# EAGLE board MicroMod-LoRa-1W-Function-Board-Panel (EAGLE 9.6.2), part 1 of 2
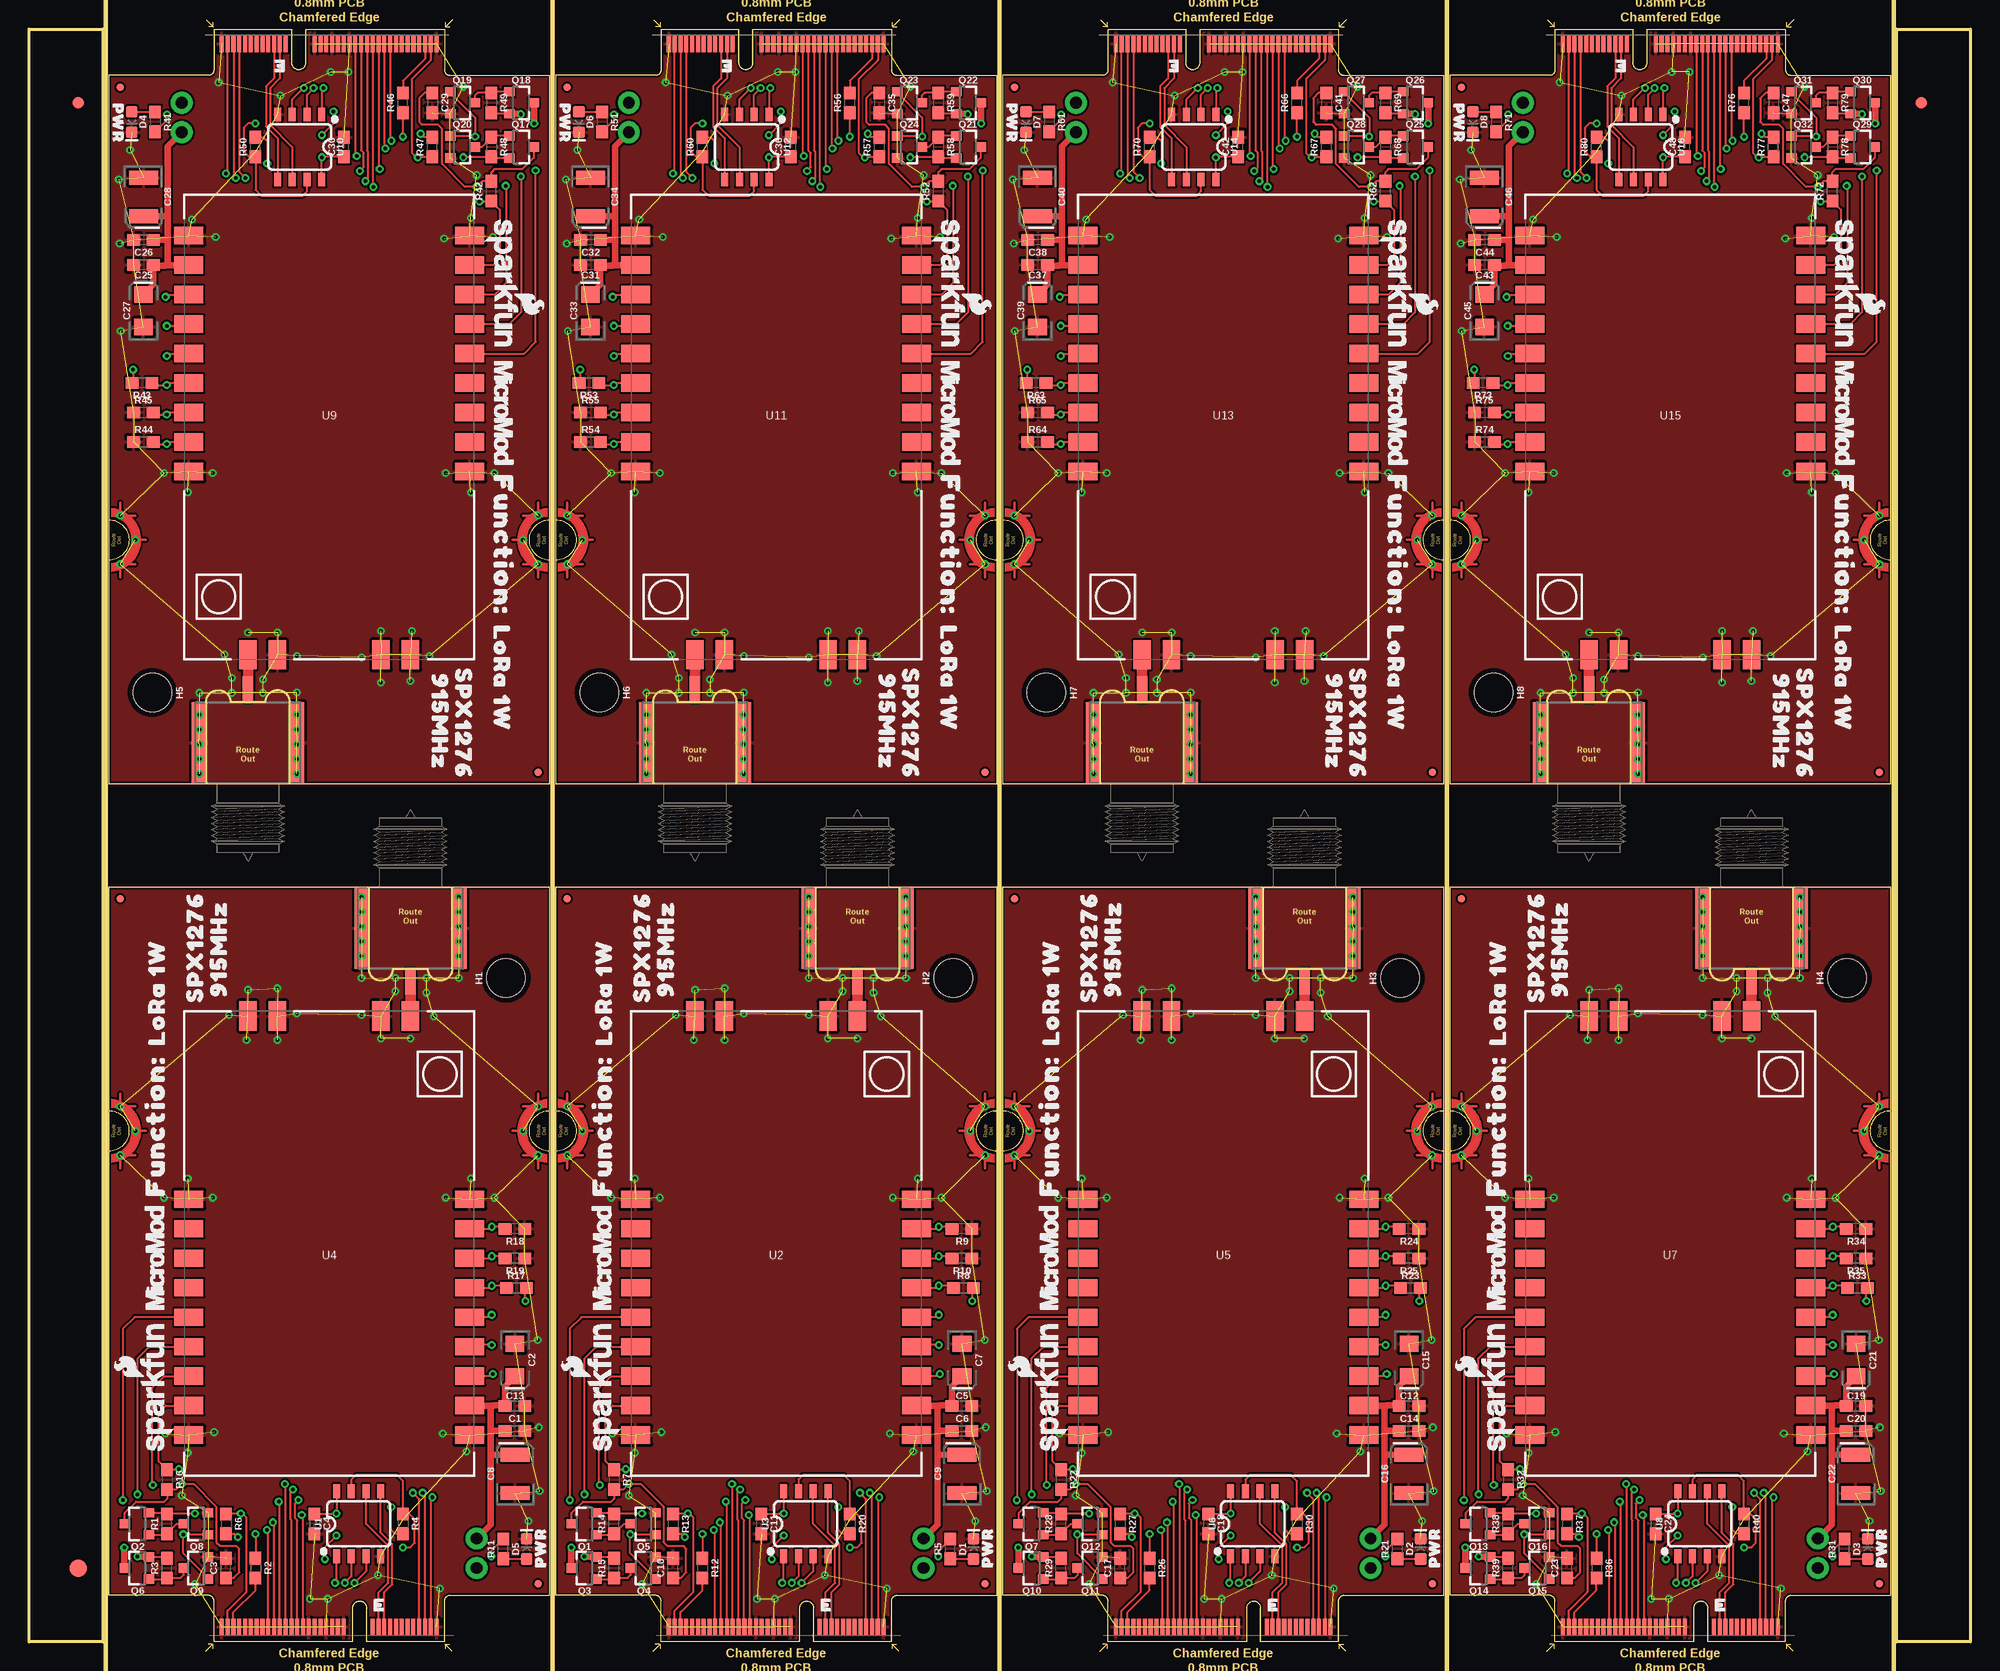
[diagram p0: board, top side]
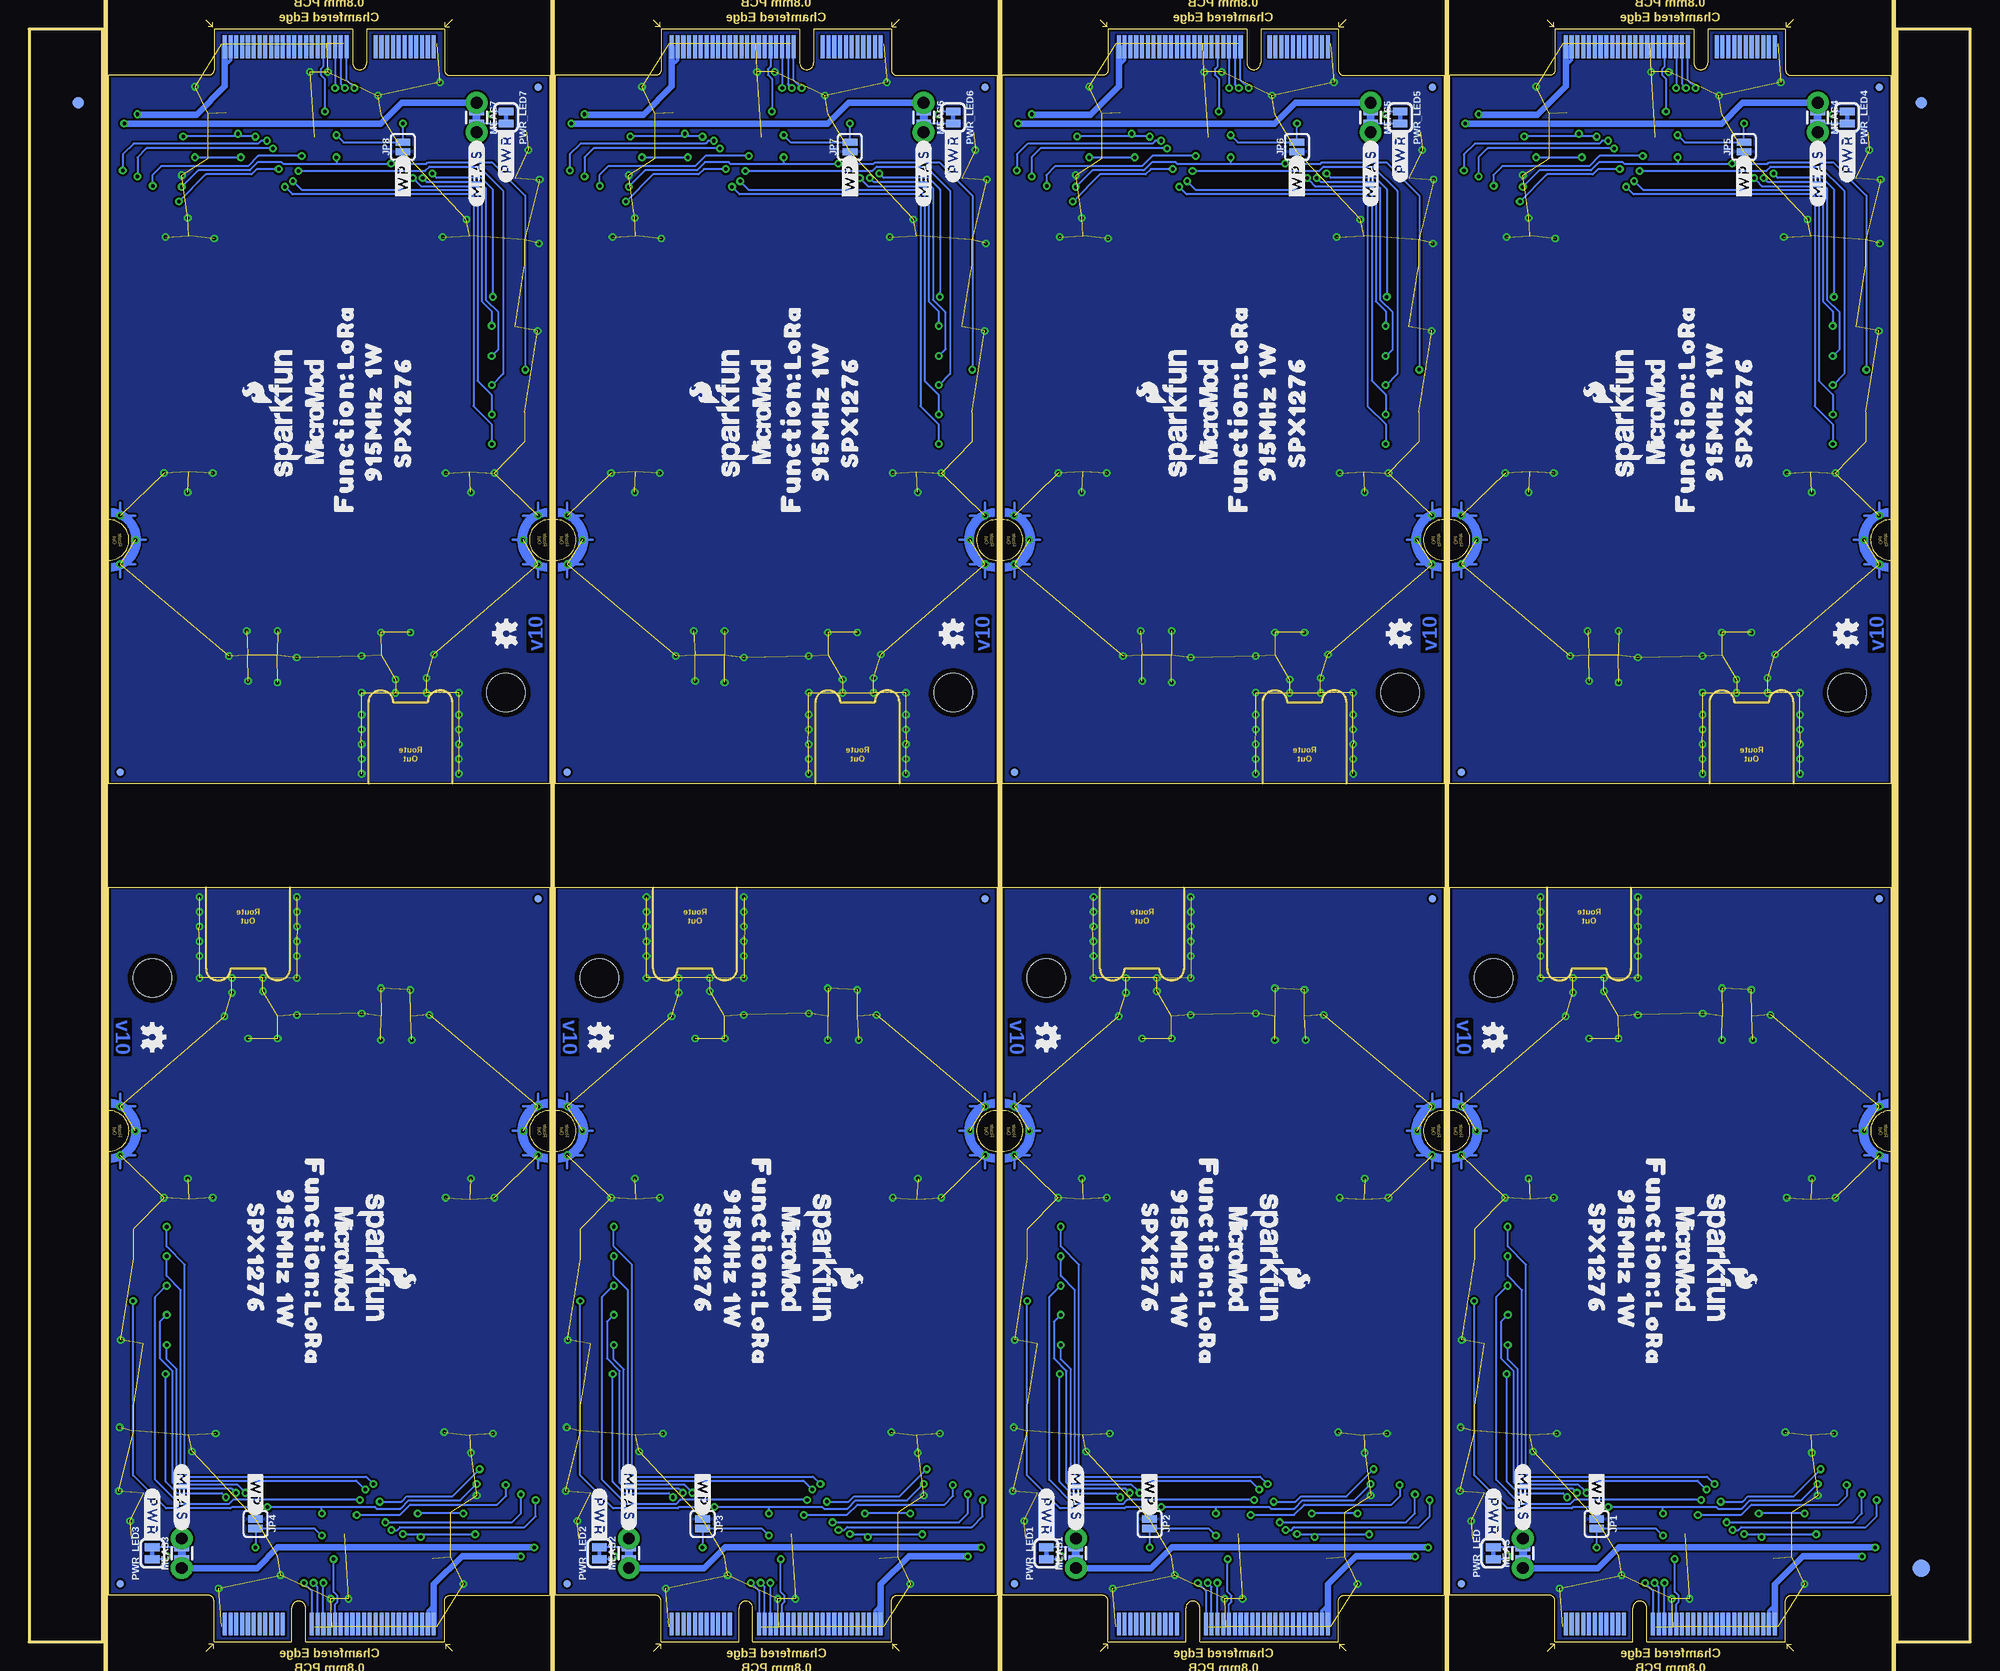
[diagram p1: board, bottom side, seen from below]

Size 167.24 x 138.89 mm. Coordinates in mm from the lower left corner, seen from the top.
Outline: 35.78,0 29.08,0 29.08,2.9 arc180 27.88,2.9 27.88,0 15.93,0 15.93,3.5 arc90 15.46,4 6.86,4 6.86,65 44.86,65 44.86,4 36.26,4 arc90 35.78,3.5 35.78,0
Outline: 74.29,0 67.59,0 67.59,2.9 arc180 66.39,2.9 66.39,0 54.44,0 54.44,3.5 arc90 53.97,4 45.37,4 45.37,65 83.37,65 83.37,4 74.77,4 arc90 74.29,3.5 74.29,0
Outline: 112.8,0 106.1,0 106.1,2.9 arc180 104.9,2.9 104.9,0 92.95,0 92.95,3.5 arc90 92.47,4 83.87,4 83.87,65 121.87,65 121.87,4 113.27,4 arc90 112.8,3.5 112.8,0
Outline: 151.31,0 144.61,0 144.61,2.9 arc180 143.41,2.9 143.41,0 131.46,0 131.46,3.5 arc90 130.98,4 122.38,4 122.38,65 160.38,65 160.38,4 151.78,4 arc90 151.31,3.5 151.31,0
Outline: 15.93,138.89 22.63,138.89 22.63,135.99 arc180 23.84,135.99 23.84,138.89 35.78,138.89 35.78,135.39 arc90 36.26,134.89 44.86,134.89 44.86,73.89 6.86,73.89 6.86,134.89 15.46,134.89 arc90 15.93,135.39 15.93,138.89
Outline: 54.44,138.89 61.14,138.89 61.14,135.99 arc180 62.34,135.99 62.34,138.89 74.29,138.89 74.29,135.39 arc90 74.77,134.89 83.37,134.89 83.37,73.89 45.37,73.89 45.37,134.89 53.97,134.89 arc90 54.44,135.39 54.44,138.89
Outline: 92.95,138.89 99.65,138.89 99.65,135.99 arc180 100.85,135.99 100.85,138.89 112.8,138.89 112.8,135.39 arc90 113.28,134.89 121.88,134.89 121.88,73.89 83.88,73.89 83.88,134.89 92.48,134.89 arc90 92.95,135.39 92.95,138.89
Outline: 131.46,138.89 138.16,138.89 138.16,135.99 arc180 139.36,135.99 139.36,138.89 151.31,138.89 151.31,135.39 arc90 151.78,134.89 160.38,134.89 160.38,73.89 122.38,73.89 122.38,134.89 130.98,134.89 arc90 131.46,135.39 131.46,138.89
Outline: 160.89,138.89 167.24,138.89 167.24,0 160.89,0 160.89,138.89
Outline: 0,138.89 6.35,138.89 6.35,0 0,0 0,138.89
Copper layers (1*16): Top 0.035mm / dielectric 1.5mm / Bottom 0.035mm
Design rules "MicroMod-LoRa-1W-Function-Board": minimum track width 7mil, minimum drill 12mil, track to track 7mil, track to pad 7mil, pad to pad 7mil, via to via 7mil, smd to smd 7mil, copper to edge 7mil, drill to drill 7mil, minimum pad ring 7mil, minimum via ring 7mil, stop-mask expansion 4mil, vias tented up to drill 25mil, thermal gap 10mil
Net classes: 0 default: width 0 mm, drill 0 mm
Milling: 5 lines

## Footprints (pad centres in the part's own frame; a part is rotated, then mirrored left to right if it is on the bottom)
0603 = smd 1.1 x 1: 1 -0.85,0; 2 0.85,0
EIA3216 = smd 1.4 x 1.6: + 1.4,0; - -1.4,0
EIA3528 = smd 1.2 x 2.5: A 1.65,0; C -1.65,0
LED-0603 = smd 1 x 1: A -0.877,0; C 0.877,0
SMA-EDGE-SMD = smd 1.15 x 7: GND@0 -4.25,-3.5; GND@1 4.25,-3.5 | smd 0.9 x 2.2: SIG 0,-8.1
FIDUCIAL-1X2 = smd 1 x 1: 1 0,0
FIDUCIAL-1.5X3 = smd 1.5 x 1.5: 1 0,0
FIDUCIAL-MICRO = smd 0.635 x 0.635: 1 0,0
STAND-OFF = hole 3.302: 0,0
M.2-CARD-E-22_FUNCTION_STANDARD = smd 0.35 x 1.45: 1 9.25,1.275; 3 8.75,1.275; 5 8.25,1.275; 7 7.75,1.275; 9 7.25,1.275; 11 6.75,1.275; 13 6.25,1.275; 15 5.75,1.275; 17 5.25,1.275; 19 4.75,1.275; 21 4.25,1.275; 23 3.75,1.275; 33 1.25,1.275; 35 0.75,1.275; 37 0.25,1.275; 39 -0.25,1.275; 41 -0.75,1.275; 43 -1.25,1.275; 45 -1.75,1.275; 47 -2.25,1.275; 49 -2.75,1.275; 51 -3.25,1.275; 53 -3.75,1.275; 55 -4.25,1.275; 57 -4.75,1.275; 59 -5.25,1.275; 61 -5.75,1.275; 63 -6.25,1.275; 65 -6.75,1.275; 67 -7.25,1.275; 69 -7.75,1.275; 71 -8.25,1.275; 73 -8.75,1.275; 75 -9.25,1.275 | smd 0.35 x 1.95 bottom: 2 9,1.525; 4 8.5,1.525; 6 8,1.525; 8 7.5,1.525; 10 7,1.525; 12 6.5,1.525; 14 6,1.525; 16 5.5,1.525; 18 5,1.525; 20 4.5,1.525; 22 4,1.525; 32 1.5,1.525; 34 1,1.525; 36 0.5,1.525; 38 0,1.525; 40 -0.5,1.525; 42 -1,1.525; 44 -1.5,1.525; 46 -2,1.525; 48 -2.5,1.525; 50 -3,1.525; 52 -3.5,1.525; 54 -4,1.525; 56 -4.5,1.525; 58 -5,1.525; 60 -5.5,1.525; 62 -6,1.525; 64 -6.5,1.525; 66 -7,1.525; 68 -7.5,1.525; 70 -8,1.525; 72 -8.5,1.525; 74 -9,1.525 | drill 0.305 pad 0.61: GND1 -18,41.9; GND2 -16.7,44; GND3 -18,46.1; GND4 18,41.9; GND5 16.7,44; GND6 18,46.1
SMT-JUMPER_2_NO_SILK = smd 0.635 x 1.27: 1 -0.406,0; 2 0.406,0
COMBO-JUMPER_2_NC_TRACE = smd 0.635 x 1.27: 1 -0.508,0; 2 0.508,0 | drill 1.016 pad 1.88: 3 -1.27,0; 4 1.27,0
SMT-JUMPER_2_NC_TRACE_SILK = smd 0.66 x 1.27: 1 -0.521,0; 2 0.521,0
SOT23-3 = smd 0.8 x 0.9: 1 -0.95,-1; 2 0.95,-1; 3 0,1.1
SO08 = smd 0.6 x 1.2: 1 -1.905,-2.8; 2 -0.635,-2.8; 3 0.635,-2.8; 4 1.905,-2.8; 5 1.905,2.8; 6 0.635,2.8; 7 -0.635,2.8; 8 -1.905,2.8
E19-915MS1W = smd 2.5 x 1.5: 1 12.1,-3.82; 2 12.1,-1.28; 3 12.1,1.26; 4 12.1,3.8; 5 12.1,6.34; 6 12.1,8.88; 7 12.1,11.42; 8 12.1,13.96; 9 12.1,16.5; 10 -12.1,16.5; 11 -12.1,13.96; 12 -12.1,11.42; 13 -12.1,8.88; 14 -12.1,6.34; 15 -12.1,3.8; 16 -12.1,1.26; 17 -12.1,-1.28; 18 -12.1,-3.82 | smd 1.5 x 2.5: 19 -7,-19.6; 20 -4.46,-19.6; 21 4.46,-19.6; 22 7,-19.6

## Placement (x,y rotation side)
C1  0.1uF  [0603]  41.86,18.16 0 top
C2  10uF  [EIA3216]  41.86,24.26 270 top
C3  0.1uF  [0603]  16.97,6.35 90 top
C4  0.1uF  [0603]  24.59,10.16 270 top
C5  0.22uF  [0603]  80.37,20.32 0 top
C6  0.1uF  [0603]  80.37,18.16 0 top
C7  10uF  [EIA3216]  80.37,24.26 270 top
C8  47uF  [EIA3528]  41.86,14.46 90 top
C9  47uF  [EIA3528]  80.37,14.46 90 top
C10  0.1uF  [0603]  55.48,6.35 90 top
C11  0.1uF  [0603]  63.1,10.16 270 top
C12  0.22uF  [0603]  118.87,20.32 0 top
C13  0.22uF  [0603]  41.86,20.32 0 top
C14  0.1uF  [0603]  118.87,18.16 0 top
C15  10uF  [EIA3216]  118.87,24.26 270 top
C16  47uF  [EIA3528]  118.87,14.46 90 top
C17  0.1uF  [0603]  93.98,6.35 90 top
C18  0.1uF  [0603]  101.6,10.16 270 top
C19  0.22uF  [0603]  157.38,20.32 0 top
C20  0.1uF  [0603]  157.38,18.16 0 top
C21  10uF  [EIA3216]  157.38,24.26 270 top
C22  47uF  [EIA3528]  157.38,14.46 90 top
C23  0.1uF  [0603]  132.49,6.35 90 top
C24  0.1uF  [0603]  140.11,10.16 270 top
C25  0.22uF  [0603]  9.86,118.57 180 top
C26  0.1uF  [0603]  9.86,120.73 180 top
C27  10uF  [EIA3216]  9.86,114.63 90 top
C28  47uF  [EIA3528]  9.86,124.43 270 top
C29  0.1uF  [0603]  34.75,132.54 270 top
C30  0.1uF  [0603]  27.13,128.73 90 top
C31  0.22uF  [0603]  48.36,118.57 180 top
C32  0.1uF  [0603]  48.36,120.73 180 top
C33  10uF  [EIA3216]  48.36,114.63 90 top
C34  47uF  [EIA3528]  48.37,124.43 270 top
C35  0.1uF  [0603]  73.26,132.54 270 top
C36  0.1uF  [0603]  65.64,128.73 90 top
C37  0.22uF  [0603]  86.87,118.57 180 top
C38  0.1uF  [0603]  86.87,120.73 180 top
C39  10uF  [EIA3216]  86.87,114.63 90 top
C40  47uF  [EIA3528]  86.88,124.43 270 top
C41  0.1uF  [0603]  111.77,132.54 270 top
C42  0.1uF  [0603]  104.15,128.73 90 top
C43  0.22uF  [0603]  125.38,118.57 180 top
C44  0.1uF  [0603]  125.38,120.73 180 top
C45  10uF  [EIA3216]  125.38,114.63 90 top
C46  47uF  [EIA3528]  125.38,124.43 270 top
C47  0.1uF  [0603]  150.27,132.54 270 top
C48  0.1uF  [0603]  142.65,128.73 90 top
D1  RED  [LED-0603]  81.37,8 90 top
D2  RED  [LED-0603]  119.87,8 90 top
D3  RED  [LED-0603]  158.38,8 90 top
D4  RED  [LED-0603]  8.86,130.89 270 top
D5  RED  [LED-0603]  42.86,8 90 top
D6  RED  [LED-0603]  47.37,130.89 270 top
D7  RED  [LED-0603]  85.88,130.89 270 top
D8  RED  [LED-0603]  124.38,130.89 270 top
E1  RP-SMA  [SMA-EDGE-SMD]  32.86,64.96 0 top
E2  RP-SMA  [SMA-EDGE-SMD]  71.37,64.96 0 top
E3  RP-SMA  [SMA-EDGE-SMD]  109.87,64.96 0 top
E4  RP-SMA  [SMA-EDGE-SMD]  148.38,64.96 0 top
E5  RP-SMA  [SMA-EDGE-SMD]  18.86,73.93 180 top
E6  RP-SMA  [SMA-EDGE-SMD]  57.37,73.93 180 top
E7  RP-SMA  [SMA-EDGE-SMD]  95.88,73.93 180 top
E8  RP-SMA  [SMA-EDGE-SMD]  134.38,73.93 180 top
E$1  [FIDUCIAL-1X2]  4.23,132.54 0 top
E$2  [FIDUCIAL-1X2]  4.23,132.54 0 bottom
E$3  [FIDUCIAL-1X2]  163.01,132.54 0 top
E$4  [FIDUCIAL-1X2]  163.01,132.54 0 bottom
E$5  [FIDUCIAL-1.5X3]  4.23,6.35 0 top
E$6  [FIDUCIAL-1.5X3]  4.23,6.35 0 bottom
FD1  FIDUCIALUFIDUCIAL  [FIDUCIAL-MICRO]  43.86,5 90 top
FD2  FIDUCIALUFIDUCIAL  [FIDUCIAL-MICRO]  7.86,64 90 top
FD3  FIDUCIALUFIDUCIAL  [FIDUCIAL-MICRO]  43.86,5 270 bottom
FD4  FIDUCIALUFIDUCIAL  [FIDUCIAL-MICRO]  7.86,64 270 bottom
FD5  FIDUCIALUFIDUCIAL  [FIDUCIAL-MICRO]  82.37,5 90 top
FD6  FIDUCIALUFIDUCIAL  [FIDUCIAL-MICRO]  46.37,64 90 top
FD7  FIDUCIALUFIDUCIAL  [FIDUCIAL-MICRO]  82.37,5 270 bottom
FD8  FIDUCIALUFIDUCIAL  [FIDUCIAL-MICRO]  46.37,64 270 bottom
FD9  FIDUCIALUFIDUCIAL  [FIDUCIAL-MICRO]  120.87,5 90 top
FD10  FIDUCIALUFIDUCIAL  [FIDUCIAL-MICRO]  84.87,64 90 top
FD11  FIDUCIALUFIDUCIAL  [FIDUCIAL-MICRO]  120.87,5 270 bottom
FD12  FIDUCIALUFIDUCIAL  [FIDUCIAL-MICRO]  84.87,64 270 bottom
FD13  FIDUCIALUFIDUCIAL  [FIDUCIAL-MICRO]  159.38,5 90 top
FD14  FIDUCIALUFIDUCIAL  [FIDUCIAL-MICRO]  123.38,64 90 top
FD15  FIDUCIALUFIDUCIAL  [FIDUCIAL-MICRO]  159.38,5 270 bottom
FD16  FIDUCIALUFIDUCIAL  [FIDUCIAL-MICRO]  123.38,64 270 bottom
FD17  FIDUCIALUFIDUCIAL  [FIDUCIAL-MICRO]  7.86,133.89 270 top
FD18  FIDUCIALUFIDUCIAL  [FIDUCIAL-MICRO]  43.86,74.89 270 top
FD19  FIDUCIALUFIDUCIAL  [FIDUCIAL-MICRO]  7.86,133.89 90 bottom
FD20  FIDUCIALUFIDUCIAL  [FIDUCIAL-MICRO]  43.86,74.89 90 bottom
FD21  FIDUCIALUFIDUCIAL  [FIDUCIAL-MICRO]  46.37,133.89 270 top
FD22  FIDUCIALUFIDUCIAL  [FIDUCIAL-MICRO]  82.37,74.89 270 top
FD23  FIDUCIALUFIDUCIAL  [FIDUCIAL-MICRO]  46.37,133.89 90 bottom
FD24  FIDUCIALUFIDUCIAL  [FIDUCIAL-MICRO]  82.37,74.89 90 bottom
FD25  FIDUCIALUFIDUCIAL  [FIDUCIAL-MICRO]  84.88,133.89 270 top
FD26  FIDUCIALUFIDUCIAL  [FIDUCIAL-MICRO]  120.88,74.89 270 top
FD27  FIDUCIALUFIDUCIAL  [FIDUCIAL-MICRO]  84.88,133.89 90 bottom
FD28  FIDUCIALUFIDUCIAL  [FIDUCIAL-MICRO]  120.88,74.89 90 bottom
FD29  FIDUCIALUFIDUCIAL  [FIDUCIAL-MICRO]  123.38,133.89 270 top
FD30  FIDUCIALUFIDUCIAL  [FIDUCIAL-MICRO]  159.38,74.89 270 top
FD31  FIDUCIALUFIDUCIAL  [FIDUCIAL-MICRO]  123.38,133.89 90 bottom
FD32  FIDUCIALUFIDUCIAL  [FIDUCIAL-MICRO]  159.38,74.89 90 bottom
H1  STAND-OFF  [STAND-OFF]  41.1,57.15 90 top
H2  STAND-OFF  [STAND-OFF]  79.61,57.15 90 top
H3  STAND-OFF  [STAND-OFF]  118.11,57.15 90 top
H4  STAND-OFF  [STAND-OFF]  156.62,57.15 90 top
H5  STAND-OFF  [STAND-OFF]  10.62,81.74 270 top
H6  STAND-OFF  [STAND-OFF]  49.13,81.74 270 top
H7  STAND-OFF  [STAND-OFF]  87.64,81.74 270 top
H8  STAND-OFF  [STAND-OFF]  126.14,81.74 270 top
J1  MICROMOD_STANDARD  [M.2-CARD-E-22_FUNCTION_STANDARD]  64.37,0 0 top
J2  MICROMOD_STANDARD  [M.2-CARD-E-22_FUNCTION_STANDARD]  102.87,0 0 top
J3  MICROMOD_STANDARD  [M.2-CARD-E-22_FUNCTION_STANDARD]  141.38,0 0 top
J4  MICROMOD_STANDARD  [M.2-CARD-E-22_FUNCTION_STANDARD]  25.86,138.89 180 top
J5  MICROMOD_STANDARD  [M.2-CARD-E-22_FUNCTION_STANDARD]  64.37,138.89 180 top
J6  MICROMOD_STANDARD  [M.2-CARD-E-22_FUNCTION_STANDARD]  102.88,138.89 180 top
J7  MICROMOD_STANDARD  [M.2-CARD-E-22_FUNCTION_STANDARD]  141.38,138.89 180 top
J11  MICROMOD_STANDARD  [M.2-CARD-E-22_FUNCTION_STANDARD]  25.86,0 0 top
JP1  JUMPER-SMT_2_NO_SILK  [SMT-JUMPER_2_NO_SILK]  32.21,10.16 270 bottom
JP2  JUMPER-SMT_2_NO_SILK  [SMT-JUMPER_2_NO_SILK]  70.72,10.16 270 bottom
JP3  JUMPER-SMT_2_NO_SILK  [SMT-JUMPER_2_NO_SILK]  109.22,10.16 270 bottom
JP4  JUMPER-SMT_2_NO_SILK  [SMT-JUMPER_2_NO_SILK]  147.73,10.16 270 bottom
JP5  JUMPER-SMT_2_NO_SILK  [SMT-JUMPER_2_NO_SILK]  19.51,128.73 90 bottom
JP6  JUMPER-SMT_2_NO_SILK  [SMT-JUMPER_2_NO_SILK]  58.02,128.73 90 bottom
JP7  JUMPER-SMT_2_NO_SILK  [SMT-JUMPER_2_NO_SILK]  96.53,128.73 90 bottom
JP8  JUMPER-SMT_2_NO_SILK  [SMT-JUMPER_2_NO_SILK]  135.03,128.73 90 bottom
LOGO1  SFE_LOGO_NAME_FLAME.1_INCH  [SFE_LOGO_NAME_FLAME_.1]  11,21.97 90 top
LOGO2  SFE_LOGO_NAME_FLAME.1_INCH  [SFE_LOGO_NAME_FLAME_.1]  49.51,21.97 90 top
LOGO3  OSHW-LOGOMINI  [OSHW-LOGO-MINI]  41.1,52.07 270 bottom
LOGO4  SFE_LOGO_NAME_FLAME.1_INCH  [SFE_LOGO_NAME_FLAME_.1]  22.05,33.02 270 bottom
LOGO5  OSHW-LOGOMINI  [OSHW-LOGO-MINI]  79.61,52.07 270 bottom
LOGO6  SFE_LOGO_NAME_FLAME.1_INCH  [SFE_LOGO_NAME_FLAME_.1]  60.56,33.02 270 bottom
LOGO7  SFE_LOGO_NAME_FLAME.1_INCH  [SFE_LOGO_NAME_FLAME_.1]  88.01,21.97 90 top
LOGO8  OSHW-LOGOMINI  [OSHW-LOGO-MINI]  118.11,52.07 270 bottom
LOGO9  SFE_LOGO_NAME_FLAME.1_INCH  [SFE_LOGO_NAME_FLAME_.1]  99.06,33.02 270 bottom
LOGO10  SFE_LOGO_NAME_FLAME.1_INCH  [SFE_LOGO_NAME_FLAME_.1]  126.52,21.97 90 top
LOGO11  OSHW-LOGOMINI  [OSHW-LOGO-MINI]  156.62,52.07 270 bottom
LOGO12  SFE_LOGO_NAME_FLAME.1_INCH  [SFE_LOGO_NAME_FLAME_.1]  137.57,33.02 270 bottom
LOGO13  SFE_LOGO_NAME_FLAME.1_INCH  [SFE_LOGO_NAME_FLAME_.1]  40.72,116.92 270 top
LOGO14  OSHW-LOGOMINI  [OSHW-LOGO-MINI]  10.62,86.82 90 bottom
LOGO15  SFE_LOGO_NAME_FLAME.1_INCH  [SFE_LOGO_NAME_FLAME_.1]  29.67,105.87 90 bottom
LOGO16  SFE_LOGO_NAME_FLAME.1_INCH  [SFE_LOGO_NAME_FLAME_.1]  79.23,116.92 270 top
LOGO17  OSHW-LOGOMINI  [OSHW-LOGO-MINI]  49.13,86.82 90 bottom
LOGO18  SFE_LOGO_NAME_FLAME.1_INCH  [SFE_LOGO_NAME_FLAME_.1]  68.18,105.87 90 bottom
LOGO19  SFE_LOGO_NAME_FLAME.1_INCH  [SFE_LOGO_NAME_FLAME_.1]  117.73,116.92 270 top
LOGO20  OSHW-LOGOMINI  [OSHW-LOGO-MINI]  87.64,86.82 90 bottom
LOGO21  SFE_LOGO_NAME_FLAME.1_INCH  [SFE_LOGO_NAME_FLAME_.1]  106.69,105.87 90 bottom
LOGO22  SFE_LOGO_NAME_FLAME.1_INCH  [SFE_LOGO_NAME_FLAME_.1]  156.24,116.92 270 top
LOGO23  OSHW-LOGOMINI  [OSHW-LOGO-MINI]  126.14,86.82 90 bottom
LOGO24  SFE_LOGO_NAME_FLAME.1_INCH  [SFE_LOGO_NAME_FLAME_.1]  145.19,105.87 90 bottom
MEAS  JUMPER-COMBO_2_NC_TRACE  [COMBO-JUMPER_2_NC_TRACE]  38.56,7.62 90 bottom
MEAS1  JUMPER-COMBO_2_NC_TRACE  [COMBO-JUMPER_2_NC_TRACE]  77.07,7.62 90 bottom
MEAS2  JUMPER-COMBO_2_NC_TRACE  [COMBO-JUMPER_2_NC_TRACE]  115.57,7.62 90 bottom
MEAS3  JUMPER-COMBO_2_NC_TRACE  [COMBO-JUMPER_2_NC_TRACE]  154.08,7.62 90 bottom
MEAS4  JUMPER-COMBO_2_NC_TRACE  [COMBO-JUMPER_2_NC_TRACE]  13.16,131.27 270 bottom
MEAS5  JUMPER-COMBO_2_NC_TRACE  [COMBO-JUMPER_2_NC_TRACE]  51.67,131.27 270 bottom
MEAS6  JUMPER-COMBO_2_NC_TRACE  [COMBO-JUMPER_2_NC_TRACE]  90.18,131.27 270 bottom
MEAS7  JUMPER-COMBO_2_NC_TRACE  [COMBO-JUMPER_2_NC_TRACE]  128.68,131.27 270 bottom
PWR_LED  JUMPER-SMT_2_NC_TRACE_SILK  [SMT-JUMPER_2_NC_TRACE_SILK]  41.1,7.62 90 bottom
PWR_LED1  JUMPER-SMT_2_NC_TRACE_SILK  [SMT-JUMPER_2_NC_TRACE_SILK]  79.61,7.62 90 bottom
PWR_LED2  JUMPER-SMT_2_NC_TRACE_SILK  [SMT-JUMPER_2_NC_TRACE_SILK]  118.11,7.62 90 bottom
PWR_LED3  JUMPER-SMT_2_NC_TRACE_SILK  [SMT-JUMPER_2_NC_TRACE_SILK]  156.62,7.62 90 bottom
PWR_LED4  JUMPER-SMT_2_NC_TRACE_SILK  [SMT-JUMPER_2_NC_TRACE_SILK]  10.62,131.27 270 bottom
PWR_LED5  JUMPER-SMT_2_NC_TRACE_SILK  [SMT-JUMPER_2_NC_TRACE_SILK]  49.13,131.27 270 bottom
PWR_LED6  JUMPER-SMT_2_NC_TRACE_SILK  [SMT-JUMPER_2_NC_TRACE_SILK]  87.64,131.27 270 bottom
PWR_LED7  JUMPER-SMT_2_NC_TRACE_SILK  [SMT-JUMPER_2_NC_TRACE_SILK]  126.14,131.27 270 bottom
Q1  20V/4.2A/52mΩ/1.4W  [SOT23-3]  47.86,10.16 90 top
Q2  20V/4.2A/52mΩ/1.4W  [SOT23-3]  9.35,10.16 90 top
Q3  20V/4.2A/52mΩ/1.4W  [SOT23-3]  47.86,6.35 90 top
Q4  5.8A/30V/35mΩ  [SOT23-3]  52.94,6.35 90 top
Q5  5.8A/30V/35mΩ  [SOT23-3]  52.94,10.16 90 top
Q6  20V/4.2A/52mΩ/1.4W  [SOT23-3]  9.35,6.35 90 top
Q7  20V/4.2A/52mΩ/1.4W  [SOT23-3]  86.36,10.16 90 top
Q8  5.8A/30V/35mΩ  [SOT23-3]  14.43,10.16 90 top
Q9  5.8A/30V/35mΩ  [SOT23-3]  14.43,6.35 90 top
Q10  20V/4.2A/52mΩ/1.4W  [SOT23-3]  86.36,6.35 90 top
Q11  5.8A/30V/35mΩ  [SOT23-3]  91.44,6.35 90 top
Q12  5.8A/30V/35mΩ  [SOT23-3]  91.44,10.16 90 top
Q13  20V/4.2A/52mΩ/1.4W  [SOT23-3]  124.87,10.16 90 top
Q14  20V/4.2A/52mΩ/1.4W  [SOT23-3]  124.87,6.35 90 top
Q15  5.8A/30V/35mΩ  [SOT23-3]  129.95,6.35 90 top
Q16  5.8A/30V/35mΩ  [SOT23-3]  129.95,10.16 90 top
Q17  20V/4.2A/52mΩ/1.4W  [SOT23-3]  42.37,128.73 270 top
Q18  20V/4.2A/52mΩ/1.4W  [SOT23-3]  42.37,132.54 270 top
Q19  5.8A/30V/35mΩ  [SOT23-3]  37.29,132.54 270 top
Q20  5.8A/30V/35mΩ  [SOT23-3]  37.29,128.73 270 top
Q21  20V/4.2A/52mΩ/1.4W  [SOT23-3]  80.88,128.73 270 top
Q22  20V/4.2A/52mΩ/1.4W  [SOT23-3]  80.88,132.54 270 top
Q23  5.8A/30V/35mΩ  [SOT23-3]  75.8,132.54 270 top
Q24  5.8A/30V/35mΩ  [SOT23-3]  75.8,128.73 270 top
Q25  20V/4.2A/52mΩ/1.4W  [SOT23-3]  119.39,128.73 270 top
Q26  20V/4.2A/52mΩ/1.4W  [SOT23-3]  119.39,132.54 270 top
Q27  5.8A/30V/35mΩ  [SOT23-3]  114.31,132.54 270 top
Q28  5.8A/30V/35mΩ  [SOT23-3]  114.31,128.73 270 top
Q29  20V/4.2A/52mΩ/1.4W  [SOT23-3]  157.89,128.73 270 top
Q30  20V/4.2A/52mΩ/1.4W  [SOT23-3]  157.89,132.54 270 top
Q31  5.8A/30V/35mΩ  [SOT23-3]  152.81,132.54 270 top
Q32  5.8A/30V/35mΩ  [SOT23-3]  152.81,128.73 270 top
R1  10k  [0603]  11.89,10.16 90 top
R2  470  [0603]  19.51,6.35 270 top
R3  10k  [0603]  11.89,6.35 90 top
R4  10k  [0603]  32.21,10.16 270 top
R5  1k  [0603]  79.37,8 90 top
R6  100k  [0603]  16.97,10.16 270 top
R7  100k  [0603]  50.4,13.97 270 top
R8  100k  [0603]  80.5,30.48 0 top
R9  100k  [0603]  80.37,35.56 180 top
R10  100k  [0603]  80.37,33.02 180 top
R11  1k  [0603]  40.86,8 90 top
R12  470  [0603]  58.02,6.35 270 top
R13  100k  [0603]  55.48,10.16 270 top
R14  10k  [0603]  50.4,10.16 90 top
R15  10k  [0603]  50.4,6.35 90 top
R16  100k  [0603]  11.89,13.97 270 top
R17  100k  [0603]  41.99,30.48 0 top
R18  100k  [0603]  41.86,35.56 180 top
R19  100k  [0603]  41.86,33.02 180 top
R20  10k  [0603]  70.72,10.16 270 top
R21  1k  [0603]  117.87,8 90 top
R22  100k  [0603]  88.9,13.97 270 top
R23  100k  [0603]  119,30.48 0 top
R24  100k  [0603]  118.87,35.56 180 top
R25  100k  [0603]  118.87,33.02 180 top
R26  470  [0603]  96.52,6.35 270 top
R27  100k  [0603]  93.98,10.16 270 top
R28  10k  [0603]  88.9,10.16 90 top
R29  10k  [0603]  88.9,6.35 90 top
R30  10k  [0603]  109.22,10.16 270 top
R31  1k  [0603]  156.38,8 90 top
R32  100k  [0603]  127.41,13.97 270 top
R33  100k  [0603]  157.51,30.48 0 top
R34  100k  [0603]  157.38,35.56 180 top
R35  100k  [0603]  157.38,33.02 180 top
R36  470  [0603]  135.03,6.35 270 top
R37  100k  [0603]  132.49,10.16 270 top
R38  10k  [0603]  127.41,10.16 90 top
R39  10k  [0603]  127.41,6.35 90 top
R40  10k  [0603]  147.73,10.16 270 top
R41  1k  [0603]  10.86,130.89 270 top
R42  100k  [0603]  39.83,124.92 90 top
R43  100k  [0603]  9.73,108.41 180 top
R44  100k  [0603]  9.86,103.33 0 top
R45  100k  [0603]  9.86,105.87 0 top
R46  470  [0603]  32.21,132.54 90 top
R47  100k  [0603]  34.75,128.73 90 top
R48  10k  [0603]  39.83,128.73 270 top
R49  10k  [0603]  39.83,132.54 270 top
R50  10k  [0603]  19.51,128.73 90 top
R51  1k  [0603]  49.37,130.89 270 top
R52  100k  [0603]  78.34,124.92 90 top
R53  100k  [0603]  48.24,108.41 180 top
R54  100k  [0603]  48.36,103.33 0 top
R55  100k  [0603]  48.36,105.87 0 top
R56  470  [0603]  70.72,132.54 90 top
R57  100k  [0603]  73.26,128.73 90 top
R58  10k  [0603]  78.34,128.73 270 top
R59  10k  [0603]  78.34,132.54 270 top
R60  10k  [0603]  58.02,128.73 90 top
R61  1k  [0603]  87.88,130.89 270 top
R62  100k  [0603]  116.85,124.92 90 top
R63  100k  [0603]  86.75,108.41 180 top
R64  100k  [0603]  86.87,103.33 0 top
R65  100k  [0603]  86.87,105.87 0 top
R66  470  [0603]  109.23,132.54 90 top
R67  100k  [0603]  111.77,128.73 90 top
R68  10k  [0603]  116.85,128.73 270 top
R69  10k  [0603]  116.85,132.54 270 top
R70  10k  [0603]  96.53,128.73 90 top
R71  1k  [0603]  126.38,130.89 270 top
R72  100k  [0603]  155.35,124.92 90 top
R73  100k  [0603]  125.26,108.41 180 top
R74  100k  [0603]  125.38,103.33 0 top
R75  100k  [0603]  125.38,105.87 0 top
R76  470  [0603]  147.73,132.54 90 top
R77  100k  [0603]  150.27,128.73 90 top
R78  10k  [0603]  155.35,128.73 270 top
R79  10k  [0603]  155.35,132.54 270 top
R80  10k  [0603]  135.03,128.73 90 top
U1  EEPROM  [SO08]  28.4,10.16 0 top
U2  E19-915M30S  [E19-915MS1W]  64.37,34.29 180 top
U3  EEPROM  [SO08]  66.91,10.16 0 top
U4  E19-915M30S  [E19-915MS1W]  25.86,34.29 180 top
U5  E19-915M30S  [E19-915MS1W]  102.87,34.29 180 top
U6  EEPROM  [SO08]  105.41,10.16 0 top
U7  E19-915M30S  [E19-915MS1W]  141.38,34.29 180 top
U8  EEPROM  [SO08]  143.92,10.16 0 top
U9  E19-915M30S  [E19-915MS1W]  25.86,104.6 0 top
U10  EEPROM  [SO08]  23.32,128.73 180 top
U11  E19-915M30S  [E19-915MS1W]  64.37,104.6 0 top
U12  EEPROM  [SO08]  61.83,128.73 180 top
U13  E19-915M30S  [E19-915MS1W]  102.88,104.6 0 top
U14  EEPROM  [SO08]  100.34,128.73 180 top
U15  E19-915M30S  [E19-915MS1W]  141.38,104.6 0 top
U16  EEPROM  [SO08]  138.84,128.73 180 top
U$1  [LORA0]  27.25,26.54 270 bottom
U$2  [1W1]  11,58.93 90 top
U$3  [915MHZ2]  16.33,59.69 90 top
U$4  [FUNCTION#0]  27.13,35.56 270 bottom
U$5  [LORA0]  11,54.1 90 top
U$6  [SPX12763]  14.3,59.82 90 top
U$7  [PWR0]  44.06,8.1 90 top
U$8  [FUNCTION#0]  10.87,44.45 90 top
U$9  [#PWR#0]  41.1,10.79 270 bottom
U$10  [#WP#0]  32.21,12.83 270 bottom
U$11  [MICROMOD_LOGO_.35]  49.37,33 90 top
U$12  [MICROMOD_LOGO_.35]  63.1,33.02 270 bottom
U$13  [#MEAS#3]  77.07,15.24 270 bottom
U$14  [1W1]  49.51,58.93 90 top
U$15  [915MHZ2]  54.84,59.69 90 top
U$16  [LORA0]  49.51,54.1 90 top
U$17  [SPX12763]  52.81,59.82 90 top
U$18  [PWR0]  82.57,8.1 90 top
U$19  [LORA0]  65.76,26.54 270 bottom
U$20  [SPX12763]  70.72,33.02 270 bottom
U$21  [915MHZ2]  68.18,34.8 270 bottom
U$22  [1W1]  68.18,28.45 270 bottom
U$23  [FUNCTION#0]  49.38,44.45 90 top
U$24  [#PWR#0]  79.61,10.79 270 bottom
U$25  [FUNCTION#0]  65.64,35.56 270 bottom
U$26  [#WP#0]  70.72,12.83 270 bottom
U$27  [SPX12763]  32.21,33.02 270 bottom
U$28  [#MEAS#3]  38.56,15.24 270 bottom
U$29  [915MHZ2]  29.67,34.8 270 bottom
U$30  [1W1]  29.67,28.45 270 bottom
U$31  [MICROMOD_LOGO_.35]  87.87,33 90 top
U$32  [MICROMOD_LOGO_.35]  101.6,33.02 270 bottom
U$33  [#MEAS#3]  115.57,15.24 270 bottom
U$34  [1W1]  88.01,58.93 90 top
U$35  [915MHZ2]  93.35,59.69 90 top
U$36  [LORA0]  88.01,54.1 90 top
U$37  [MICROMOD_LOGO_.35]  24.59,33.02 270 bottom
U$38  [SPX12763]  91.32,59.82 90 top
U$39  [PWR0]  121.07,8.1 90 top
U$40  [LORA0]  104.27,26.54 270 bottom
U$41  [SPX12763]  109.22,33.02 270 bottom
U$42  [915MHZ2]  106.68,34.8 270 bottom
U$43  [1W1]  106.68,28.45 270 bottom
U$44  [FUNCTION#0]  87.89,44.45 90 top
U$45  [#PWR#0]  118.11,10.79 270 bottom
U$46  [FUNCTION#0]  104.14,35.56 270 bottom
U$47  [#WP#0]  109.22,12.83 270 bottom
U$48  [MICROMOD_LOGO_.35]  126.38,33 90 top
U$49  [MICROMOD_LOGO_.35]  140.11,33.02 270 bottom
U$50  [#MEAS#3]  154.08,15.24 270 bottom
U$51  [1W1]  126.52,58.93 90 top
U$52  [915MHZ2]  131.86,59.69 90 top
U$53  [LORA0]  126.52,54.1 90 top
U$54  [SPX12763]  129.82,59.82 90 top
U$55  [PWR0]  159.58,8.1 90 top
U$56  [LORA0]  142.78,26.54 270 bottom
U$57  [SPX12763]  147.73,33.02 270 bottom
U$58  [915MHZ2]  145.19,34.8 270 bottom
U$59  [1W1]  145.19,28.45 270 bottom
U$60  [FUNCTION#0]  126.4,44.45 90 top
U$61  [#PWR#0]  156.62,10.79 270 bottom
U$62  [FUNCTION#0]  142.65,35.56 270 bottom
U$63  [MICROMOD_LOGO_.35]  10.86,33 90 top
U$64  [#WP#0]  147.73,12.83 270 bottom
U$65  [MICROMOD_LOGO_.35]  40.86,105.89 270 top
U$66  [MICROMOD_LOGO_.35]  27.13,105.87 90 bottom
U$67  [#MEAS#3]  13.16,123.65 90 bottom
U$68  [1W1]  40.72,79.96 270 top
U$69  [915MHZ2]  35.38,79.2 270 top
U$70  [LORA0]  40.72,84.79 270 top
U$71  [SPX12763]  37.42,79.07 270 top
U$72  [PWR0]  7.66,130.79 270 top
U$73  [LORA0]  24.46,112.35 90 bottom
U$74  [SPX12763]  19.51,105.87 90 bottom
U$75  [915MHZ2]  22.05,104.09 90 bottom
U$76  [1W1]  22.05,110.44 90 bottom
U$77  [FUNCTION#0]  40.85,94.44 270 top
U$78  [#PWR#0]  10.62,128.09 90 bottom
U$79  [FUNCTION#0]  24.59,103.33 90 bottom
U$80  [#WP#0]  19.51,126.06 90 bottom
U$81  [MICROMOD_LOGO_.35]  79.37,105.89 270 top
U$82  [MICROMOD_LOGO_.35]  65.64,105.87 90 bottom
U$83  [#MEAS#3]  51.67,123.65 90 bottom
U$84  [1W1]  79.23,79.96 270 top
U$85  [915MHZ2]  73.89,79.2 270 top
U$86  [LORA0]  79.23,84.79 270 top
U$87  [SPX12763]  75.92,79.07 270 top
U$88  [PWR0]  46.17,130.79 270 top
U$89  [LORA0]  62.97,112.35 90 bottom
U$90  [SPX12763]  58.02,105.87 90 bottom
U$91  [915MHZ2]  60.56,104.09 90 bottom
U$92  [1W1]  60.56,110.44 90 bottom
U$93  [FUNCTION#0]  79.35,94.44 270 top
U$94  [#PWR#0]  49.13,128.09 90 bottom
U$95  [FUNCTION#0]  63.1,103.33 90 bottom
U$96  [#WP#0]  58.02,126.06 90 bottom
U$97  [MICROMOD_LOGO_.35]  117.88,105.89 270 top
U$98  [MICROMOD_LOGO_.35]  104.15,105.87 90 bottom
U$99  [#MEAS#3]  90.18,123.65 90 bottom
U$100  [1W1]  117.73,79.96 270 top
U$101  [915MHZ2]  112.4,79.2 270 top
U$102  [LORA0]  117.73,84.79 270 top
U$103  [SPX12763]  114.43,79.07 270 top
U$104  [PWR0]  84.68,130.79 270 top
U$105  [LORA0]  101.48,112.35 90 bottom
U$106  [SPX12763]  96.53,105.87 90 bottom
U$107  [915MHZ2]  99.07,104.09 90 bottom
U$108  [1W1]  99.07,110.44 90 bottom
U$109  [FUNCTION#0]  117.86,94.44 270 top
U$110  [#PWR#0]  87.64,128.09 90 bottom
U$111  [FUNCTION#0]  101.61,103.33 90 bottom
U$112  [#WP#0]  96.53,126.06 90 bottom
U$113  [MICROMOD_LOGO_.35]  156.38,105.89 270 top
U$114  [MICROMOD_LOGO_.35]  142.65,105.87 90 bottom
U$115  [#MEAS#3]  128.68,123.65 90 bottom
U$116  [1W1]  156.24,79.96 270 top
U$117  [915MHZ2]  150.91,79.2 270 top
U$118  [LORA0]  156.24,84.79 270 top
U$119  [SPX12763]  152.94,79.07 270 top
U$120  [PWR0]  123.18,130.79 270 top
U$121  [LORA0]  139.99,112.35 90 bottom
U$122  [SPX12763]  135.03,105.87 90 bottom
U$123  [915MHZ2]  137.57,104.09 90 bottom
U$124  [1W1]  137.57,110.44 90 bottom
U$125  [FUNCTION#0]  156.37,94.44 270 top
U$126  [#PWR#0]  126.14,128.09 90 bottom
U$127  [FUNCTION#0]  140.11,103.33 90 bottom
U$128  [#WP#0]  135.03,126.06 90 bottom

## Library data of the parts
C1 C3 C4 C6 C10 C11 C14 C17 C18 C20 C23 C24 C26 C29 C30 C32 C35 C36 C38 C41 C42 C44 C47 C48 = SparkFun-Capacitors; PROD_ID: CAP-00810
C2 C7 C15 C21 C27 C33 C39 C45 = SparkFun-Capacitors; PROD_ID: CAP-00811
C5 C12 C13 C19 C25 C31 C37 C43 = SparkFun-Capacitors; PROD_ID: CAP-07822
C8 C9 C16 C22 C28 C34 C40 C46 = SparkFun-Capacitors; PROD_ID: CAP-08310
D1-D8 = SparkFun-LED; PROD_ID: DIO-00819
E1-E8 = SparkFun-RF; PROD_ID: CONN-15101
E$1-E$4 FD1-FD32 LOGO1-LOGO24 = SparkFun-Aesthetics
E$5 E$6 = SparkFun-Retired
H1-H8 = SparkFun-Hardware
J1-J7 J11 = SparkFun-MicroMod-Function
JP1-JP8 MEAS MEAS1-MEAS7 PWR_LED PWR_LED1-PWR_LED7 = SparkFun-Jumpers
Q1-Q3 Q6 Q7 Q10 Q13 Q14 Q17 Q18 Q21 Q22 Q25 Q26 Q29 Q30 = SparkFun-DiscreteSemi; PROD_ID: TRANS-14388
Q4 Q5 Q8 Q9 Q11 Q12 Q15 Q16 Q19 Q20 Q23 Q24 Q27 Q28 Q31 Q32 = SparkFun-DiscreteSemi; PROD_ID: TRANS-12988
R1 R3 R4 R14 R15 R20 R28-R30 R38-R40 R48-R50 R58-R60 R68-R70 R78-R80 = SparkFun-Resistors; PROD_ID: RES-00824
R2 R12 R26 R36 R46 R56 R66 R76 = SparkFun-Resistors; PROD_ID: RES-07869
R5 R11 R21 R31 R41 R51 R61 R71 = SparkFun-Resistors; PROD_ID: RES-07856
R6-R10 R13 R16-R19 R22-R25 R27 R32-R35 R37 R42-R45 R47 R52-R55 R57 R62-R65 R67 R72-R75 R77 = SparkFun-Resistors; PROD_ID: RES-07828
U1 U3 U6 U8 U10 U12 U14 U16 = SparkFun-IC-Memory; PROD_ID: IC-14645
U2 U4 U5 U7 U9 U11 U13 U15 = SparkFun-RF; PROD_ID: IC-14076
U$1-U$10 U$13-U$30 U$33-U$36 U$38-U$47 U$50-U$62 U$64 U$67-U$80 U$83-U$96 U$99-U$112 U$115-U$128 = output
U$11 U$12 U$31 U$32 U$37 U$48 U$49 U$63 U$65 U$66 U$81 U$82 U$97 U$98 U$113 U$114 = SparkFun-MicroMod

## Nets
3.3V: C3.1 C4.1 Q2.3 R4.2 R16.2 R17.2 U1.8
3.3V1: C10.1 C11.1 Q1.3 R7.2 R8.2 R20.2 U3.8
3.3V2: C17.1 C18.1 Q7.3 R22.2 R23.2 R30.2 U6.8
3.3V3: C23.1 C24.1 Q13.3 R32.2 R33.2 R40.2 U8.8
3.3V4: C29.1 C30.1 Q17.3 R42.2 R43.2 R50.2 U10.8
3.3V5: C35.1 C36.1 Q21.3 R52.2 R53.2 R60.2 U12.8
3.3V6: C41.1 C42.1 Q25.3 R62.2 R63.2 R70.2 U14.8
3.3V7: C47.1 C48.1 Q29.3 R72.2 R73.2 R80.2 U16.8
3.3V_IN: J11.73 Q2.2 R1.2 R6.1
3.3V_IN1: J1.73 Q1.2 R13.1 R14.2
3.3V_IN2: J2.73 Q7.2 R27.1 R28.2
3.3V_IN3: J3.73 Q13.2 R37.1 R38.2
3.3V_IN4: J4.73 Q17.2 R47.1 R48.2
3.3V_IN5: J5.73 Q21.2 R57.1 R58.2
3.3V_IN6: J6.73 Q25.2 R67.1 R68.2
3.3V_IN7: J7.73 Q29.2 R77.1 R78.2
5V: C1.1 C2.+ C8.A C13.1 MEAS.2 MEAS.4 PWR_LED.2 U4.11
5V1: C5.1 C6.1 C7.+ C9.A MEAS1.2 MEAS1.4 PWR_LED1.2 U2.11
5V2: C12.1 C14.1 C15.+ C16.A MEAS2.2 MEAS2.4 PWR_LED2.2 U5.11
5V3: C19.1 C20.1 C21.+ C22.A MEAS3.2 MEAS3.4 PWR_LED3.2 U7.11
5V4: C25.1 C26.1 C27.+ C28.A MEAS4.2 MEAS4.4 PWR_LED4.2 U9.11
5V5: C31.1 C32.1 C33.+ C34.A MEAS5.2 MEAS5.4 PWR_LED5.2 U11.11
5V6: C37.1 C38.1 C39.+ C40.A MEAS6.2 MEAS6.4 PWR_LED6.2 U13.11
5V7: C43.1 C44.1 C45.+ C46.A MEAS7.2 MEAS7.4 PWR_LED7.2 U15.11
A0: J11.36 U1.1
A1: J11.34 U1.2
A2: J11.32 U1.3
A3: J1.36 U3.1
A4: J1.32 U3.3
A5: J1.34 U3.2
A6: J2.36 U6.1
A7: J2.32 U6.3
A8: J2.34 U6.2
A9: J3.36 U8.1
A10: J3.32 U8.3
A11: J3.34 U8.2
A12: J4.36 U10.1
A13: J4.32 U10.3
A14: J4.34 U10.2
A15: J5.36 U12.1
A16: J5.32 U12.3
A17: J5.34 U12.2
A18: J6.36 U14.1
A19: J6.32 U14.3
A20: J6.34 U14.2
A21: J7.36 U16.1
A22: J7.32 U16.3
A23: J7.34 U16.2
EWP: J11.40 JP1.2 R4.1 U1.7
EWP1: J1.40 JP2.2 R20.1 U3.7
EWP2: J2.40 JP3.2 R30.1 U6.7
EWP3: J3.40 JP4.2 R40.1 U8.7
EWP4: J4.40 JP5.2 R50.1 U10.7
EWP5: J5.40 JP6.2 R60.1 U12.7
EWP6: J6.40 JP7.2 R70.1 U14.7
EWP7: J7.40 JP8.2 R80.1 U16.7
GND: C1.2 C2.- C3.2 C4.2 C8.C C13.2 D5.C E1.GND@0 E1.GND@1 J11.1 J11.33 J11.39 J11.45 J11.75 J11.GND1 J11.GND2 J11.GND3 J11.GND4 J11.GND5 J11.GND6 JP1.1 Q8.2 Q9.2 R18.1 R19.1 U1.4 U4.1 U4.9 U4.10 U4.18 U4.20 U4.21 U4.22
GND1: C5.2 C6.2 C7.- C9.C C10.2 C11.2 D1.C E2.GND@0 E2.GND@1 J1.1 J1.33 J1.39 J1.45 J1.75 J1.GND1 J1.GND2 J1.GND3 J1.GND4 J1.GND5 J1.GND6 JP2.1 Q4.2 Q5.2 R9.1 R10.1 U2.1 U2.9 U2.10 U2.18 U2.20 U2.21 U2.22 U3.4
GND2: C12.2 C14.2 C15.- C16.C C17.2 C18.2 D2.C E3.GND@0 E3.GND@1 J2.1 J2.33 J2.39 J2.45 J2.75 J2.GND1 J2.GND2 J2.GND3 J2.GND4 J2.GND5 J2.GND6 JP3.1 Q11.2 Q12.2 R24.1 R25.1 U5.1 U5.9 U5.10 U5.18 U5.20 U5.21 U5.22 U6.4
GND3: C19.2 C20.2 C21.- C22.C C23.2 C24.2 D3.C E4.GND@0 E4.GND@1 J3.1 J3.33 J3.39 J3.45 J3.75 J3.GND1 J3.GND2 J3.GND3 J3.GND4 J3.GND5 J3.GND6 JP4.1 Q15.2 Q16.2 R34.1 R35.1 U7.1 U7.9 U7.10 U7.18 U7.20 U7.21 U7.22 U8.4
GND4: C25.2 C26.2 C27.- C28.C C29.2 C30.2 D4.C E5.GND@0 E5.GND@1 J4.1 J4.33 J4.39 J4.45 J4.75 J4.GND1 J4.GND2 J4.GND3 J4.GND4 J4.GND5 J4.GND6 JP5.1 Q19.2 Q20.2 R44.1 R45.1 U9.1 U9.9 U9.10 U9.18 U9.20 U9.21 U9.22 U10.4
GND5: C31.2 C32.2 C33.- C34.C C35.2 C36.2 D6.C E6.GND@0 E6.GND@1 J5.1 J5.33 J5.39 J5.45 J5.75 J5.GND1 J5.GND2 J5.GND3 J5.GND4 J5.GND5 J5.GND6 JP6.1 Q23.2 Q24.2 R54.1 R55.1 U11.1 U11.9 U11.10 U11.18 U11.20 U11.21 U11.22 U12.4
GND6: C37.2 C38.2 C39.- C40.C C41.2 C42.2 D7.C E7.GND@0 E7.GND@1 J6.1 J6.33 J6.39 J6.45 J6.75 J6.GND1 J6.GND2 J6.GND3 J6.GND4 J6.GND5 J6.GND6 JP7.1 Q27.2 Q28.2 R64.1 R65.1 U13.1 U13.9 U13.10 U13.18 U13.20 U13.21 U13.22 U14.4
GND7: C43.2 C44.2 C45.- C46.C C47.2 C48.2 D8.C E8.GND@0 E8.GND@1 J7.1 J7.33 J7.39 J7.45 J7.75 J7.GND1 J7.GND2 J7.GND3 J7.GND4 J7.GND5 J7.GND6 JP8.1 Q31.2 Q32.2 R74.1 R75.1 U15.1 U15.9 U15.10 U15.18 U15.20 U15.21 U15.22 U16.4
I2C_SCL: J11.21 U1.6
I2C_SCL1: J1.21 U3.6
I2C_SCL2: J2.21 U6.6
I2C_SCL3: J3.21 U8.6
I2C_SCL4: J4.21 U10.6
I2C_SCL5: J5.21 U12.6
I2C_SCL6: J6.21 U14.6
I2C_SCL7: J7.21 U16.6
I2C_SDA: J11.19 U1.5
I2C_SDA1: J1.19 U3.5
I2C_SDA2: J2.19 U6.5
I2C_SDA3: J3.19 U8.5
I2C_SDA4: J4.19 U10.5
I2C_SDA5: J5.19 U12.5
I2C_SDA6: J6.19 U14.5
I2C_SDA7: J7.19 U16.5
LORA_!CS!: J11.49 R17.1 U4.15
LORA_!CS!1: J1.49 R8.1 U2.15
LORA_!CS!2: J2.49 R23.1 U5.15
LORA_!CS!3: J3.49 R33.1 U7.15
LORA_!CS!4: J4.49 R43.1 U9.15
LORA_!CS!5: J5.49 R53.1 U11.15
LORA_!CS!6: J6.49 R63.1 U13.15
LORA_!CS!7: J7.49 R73.1 U15.15
LORA_!RST!: J11.55 R16.1 U4.8
LORA_!RST!1: J1.55 R7.1 U2.8
LORA_!RST!2: J2.55 R22.1 U5.8
LORA_!RST!3: J3.55 R32.1 U7.8
LORA_!RST!4: J4.55 R42.1 U9.8
LORA_!RST!5: J5.55 R52.1 U11.8
LORA_!RST!6: J6.55 R62.1 U13.8
LORA_!RST!7: J7.55 R72.1 U15.8
LORA_D0: J11.47 U4.7
LORA_D1: J11.57 U4.6
LORA_D2: J11.59 U4.5
LORA_D3: J1.47 U2.7
LORA_D4: J1.57 U2.6
LORA_D5: J1.59 U2.5
LORA_D6: J2.47 U5.7
LORA_D7: J2.57 U5.6
LORA_D8: J2.59 U5.5
LORA_D9: J3.47 U7.7
LORA_D10: J3.57 U7.6
LORA_D11: J3.59 U7.5
LORA_D12: J4.47 U9.7
LORA_D13: J4.57 U9.6
LORA_D14: J4.59 U9.5
LORA_D15: J5.47 U11.7
LORA_D16: J5.57 U11.6
LORA_D17: J5.59 U11.5
LORA_D18: J6.47 U13.7
LORA_D19: J6.57 U13.6
LORA_D20: J6.59 U13.5
LORA_D21: J7.47 U15.7
LORA_D22: J7.57 U15.6
LORA_D23: J7.59 U15.5
LORA_RXEN: J11.53 R18.2 U4.17
LORA_RXEN1: J1.53 R9.2 U2.17
LORA_RXEN2: J2.53 R24.2 U5.17
LORA_RXEN3: J3.53 R34.2 U7.17
LORA_RXEN4: J4.53 R44.2 U9.17
LORA_RXEN5: J5.53 R54.2 U11.17
LORA_RXEN6: J6.53 R64.2 U13.17
LORA_RXEN7: J7.53 R74.2 U15.17
LORA_TXEN: J11.51 R19.2 U4.16
LORA_TXEN1: J1.51 R10.2 U2.16
LORA_TXEN2: J2.51 R25.2 U5.16
LORA_TXEN3: J3.51 R35.2 U7.16
LORA_TXEN4: J4.51 R45.2 U9.16
LORA_TXEN5: J5.51 R55.2 U11.16
LORA_TXEN6: J6.51 R65.2 U13.16
LORA_TXEN7: J7.51 R75.2 U15.16
N$1: E1.SIG U4.19
N$2: Q2.1 Q8.3 R1.1
N$3: Q6.1 Q9.3 R3.1
N$4: J11.71 R2.2
N$5: D5.A R11.1
N$6: PWR_LED.1 R11.2
N$7: PWR_LED1.1 R5.2
N$8: D1.A R5.1
N$9: E2.SIG U2.19
N$10: J1.71 R12.2
N$11: Q1.1 Q5.3 R14.1
N$12: Q3.1 Q4.3 R15.1
N$13: PWR_LED2.1 R21.2
N$14: D2.A R21.1
N$15: E3.SIG U5.19
N$16: J2.71 R26.2
N$17: Q7.1 Q12.3 R28.1
N$18: Q10.1 Q11.3 R29.1
N$19: PWR_LED3.1 R31.2
N$20: D3.A R31.1
N$21: E4.SIG U7.19
N$22: J3.71 R36.2
N$23: Q13.1 Q16.3 R38.1
N$24: Q14.1 Q15.3 R39.1
N$25: PWR_LED4.1 R41.2
N$26: D4.A R41.1
N$27: E5.SIG U9.19
N$28: J4.71 R46.2
N$29: Q17.1 Q20.3 R48.1
N$30: Q18.1 Q19.3 R49.1
N$31: PWR_LED5.1 R51.2
N$32: D6.A R51.1
N$33: E6.SIG U11.19
N$34: J5.71 R56.2
N$35: Q21.1 Q24.3 R58.1
N$36: Q22.1 Q23.3 R59.1
N$37: PWR_LED6.1 R61.2
N$38: D7.A R61.1
N$39: E7.SIG U13.19
N$40: J6.71 R66.2
N$41: Q25.1 Q28.3 R68.1
N$42: Q26.1 Q27.3 R69.1
N$43: PWR_LED7.1 R71.2
N$44: D8.A R71.1
N$45: E8.SIG U15.19
N$46: J7.71 R76.2
N$47: Q29.1 Q32.3 R78.1
N$48: Q30.1 Q31.3 R79.1
PWR_EN: Q8.1 Q9.1 R2.1 R6.2
PWR_EN1: Q4.1 Q5.1 R12.1 R13.2
PWR_EN2: Q11.1 Q12.1 R26.1 R27.2
PWR_EN3: Q15.1 Q16.1 R36.1 R37.2
PWR_EN4: Q19.1 Q20.1 R46.1 R47.2
PWR_EN5: Q23.1 Q24.1 R56.1 R57.2
PWR_EN6: Q27.1 Q28.1 R66.1 R67.2
PWR_EN7: Q31.1 Q32.1 R76.1 R77.2
SPI_CIPO: J11.7 U4.13
SPI_CIPO1: J1.7 U2.13
SPI_CIPO2: J2.7 U5.13
SPI_CIPO3: J3.7 U7.13
SPI_CIPO4: J4.7 U9.13
SPI_CIPO5: J5.7 U11.13
SPI_CIPO6: J6.7 U13.13
SPI_CIPO7: J7.7 U15.13
SPI_COPI: J11.5 U4.14
SPI_COPI1: J1.5 U2.14
SPI_COPI2: J2.5 U5.14
SPI_COPI3: J3.5 U7.14
SPI_COPI4: J4.5 U9.14
SPI_COPI5: J5.5 U11.14
SPI_COPI6: J6.5 U13.14
SPI_COPI7: J7.5 U15.14
SPI_SCK: J11.3 U4.12
SPI_SCK1: J1.3 U2.12
SPI_SCK2: J2.3 U5.12
SPI_SCK3: J3.3 U7.12
SPI_SCK4: J4.3 U9.12
SPI_SCK5: J5.3 U11.12
SPI_SCK6: J6.3 U13.12
SPI_SCK7: J7.3 U15.12
VCC: MEAS.1 MEAS.3 Q6.3
VCC1: MEAS1.1 MEAS1.3 Q3.3
VCC2: MEAS2.1 MEAS2.3 Q10.3
VCC3: MEAS3.1 MEAS3.3 Q14.3
VCC4: MEAS4.1 MEAS4.3 Q18.3
VCC5: MEAS5.1 MEAS5.3 Q22.3
VCC6: MEAS6.1 MEAS6.3 Q26.3
VCC7: MEAS7.1 MEAS7.3 Q30.3
VCC_IN: J11.72 J11.74 Q6.2 R3.2
VCC_IN1: J1.72 J1.74 Q3.2 R15.2
VCC_IN2: J2.72 J2.74 Q10.2 R29.2
VCC_IN3: J3.72 J3.74 Q14.2 R39.2
VCC_IN4: J4.72 J4.74 Q18.2 R49.2
VCC_IN5: J5.72 J5.74 Q22.2 R59.2
VCC_IN6: J6.72 J6.74 Q26.2 R69.2
VCC_IN7: J7.72 J7.74 Q30.2 R79.2

## Tracks (layer width: path | path; a pad name or v marks a point on that pad's centre or on a via)
3.3V  (via drill 0.3)
  Top 0.178: U1.8 v26.49,11.05 26.45,11.01 C4.1 | v42.75,29.34 42.75,30.39 R17.2 | R4.2 31.53,9.31 31.2,9.64 v31.2,11.59 | Q2.3 8.25,11.09 9.22,12.06 11.63,12.06 11.89,12.32 R16.2 12.69,13.12 v13.16,13.59 14.18,13.59 16.14,11.62 16.14,8.57 16.46,8.26 17.86,8.26 18.11,8 18.11,5.97 17.64,5.5 C3.1
  Bottom 0.178: v42.75,29.34 42.75,14.34 39.9,11.49 34.35,11.49 34.25,11.59 v31.2,11.59 26.49,11.59 | 26.49,11.59 21.88,11.59 21.76,11.47 19.72,11.47 19.02,12.17 14.58,12.17 v13.16,13.59 | v26.49,11.05 26.49,11.59
3.3V1  (via drill 0.3)
  Top 0.178: U3.8 v65,11.05 64.96,11.01 C11.1 | v81.26,29.34 81.26,30.39 R8.2 | R20.2 70.04,9.31 69.71,9.64 v69.71,11.59 | Q1.3 46.76,11.09 47.73,12.06 50.14,12.06 50.4,12.32 R7.2 51.2,13.12 v51.67,13.59 52.68,13.59 54.65,11.62 54.65,8.57 54.97,8.26 56.36,8.26 56.62,8 56.62,5.97 56.15,5.5 C10.1
  Bottom 0.178: v81.26,29.34 81.26,14.34 78.41,11.49 72.86,11.49 72.76,11.59 v69.71,11.59 65,11.59 | 65,11.59 60.39,11.59 60.27,11.47 58.23,11.47 57.53,12.17 53.09,12.17 v51.67,13.59 | v65,11.05 65,11.59
3.3V2  (via drill 0.3)
  Top 0.178: U6.8 v103.51,11.05 103.47,11.01 C18.1 | v119.76,29.34 119.76,30.39 R23.2 | R30.2 108.54,9.31 108.22,9.64 v108.22,11.59 | Q7.3 85.26,11.09 86.24,12.06 88.65,12.06 88.9,12.32 R22.2 89.7,13.12 v90.17,13.59 91.19,13.59 93.16,11.62 93.16,8.57 93.48,8.26 94.87,8.26 95.13,8 95.13,5.97 94.66,5.5 C17.1
  Bottom 0.178: v119.76,29.34 119.76,14.34 116.92,11.49 111.37,11.49 111.27,11.59 v108.22,11.59 103.51,11.59 | 103.51,11.59 98.9,11.59 98.77,11.47 96.73,11.47 96.04,12.17 91.59,12.17 v90.17,13.59 | v103.51,11.05 103.51,11.59
3.3V3  (via drill 0.3)
  Top 0.178: U8.8 v142.02,11.05 141.98,11.01 C24.1 | v158.27,29.34 158.27,30.39 R33.2 | R40.2 147.05,9.31 146.72,9.64 v146.72,11.59 | Q13.3 123.77,11.09 124.74,12.06 127.16,12.06 127.41,12.32 R32.2 128.21,13.12 v128.68,13.59 129.7,13.59 131.67,11.62 131.67,8.57 131.98,8.26 133.38,8.26 133.63,8 133.63,5.97 133.16,5.5 C23.1
  Bottom 0.178: v158.27,29.34 158.27,14.34 155.43,11.49 149.88,11.49 149.78,11.59 v146.72,11.59 142.02,11.59 | 142.02,11.59 137.41,11.59 137.28,11.47 135.24,11.47 134.54,12.17 130.1,12.17 v128.68,13.59 | v142.02,11.05 142.02,11.59
3.3V4  (via drill 0.3)
  Top 0.178: U10.8 v25.23,127.84 25.26,127.88 C30.1 | v8.97,109.55 8.97,108.5 R43.2 | R50.2 20.19,129.58 20.52,129.25 v20.52,127.3 | Q17.3 43.47,127.8 42.5,126.83 40.08,126.83 39.83,126.57 R42.2 39.03,125.77 v38.56,125.3 37.54,125.3 35.57,127.27 35.57,130.32 35.26,130.63 33.86,130.63 33.61,130.89 33.61,132.92 34.08,133.39 C29.1
  Bottom 0.178: v8.97,109.55 8.97,124.55 11.81,127.4 17.36,127.4 17.46,127.3 v20.52,127.3 25.23,127.3 | 25.23,127.3 29.83,127.3 29.96,127.42 32,127.42 32.7,126.72 37.14,126.72 v38.56,125.3 | v25.23,127.84 25.23,127.3
3.3V5  (via drill 0.3)
  Top 0.178: U12.8 v63.73,127.84 63.77,127.88 C36.1 | v47.47,109.55 47.47,108.5 R53.2 | R60.2 58.7,129.58 59.02,129.25 v59.02,127.3 | Q21.3 81.98,127.8 81,126.83 78.59,126.83 78.34,126.57 R52.2 77.54,125.77 v77.07,125.3 76.05,125.3 74.08,127.27 74.08,130.32 73.76,130.63 72.37,130.63 72.11,130.89 72.11,132.92 72.58,133.39 C35.1
  Bottom 0.178: v47.47,109.55 47.47,124.55 50.32,127.4 55.87,127.4 55.97,127.3 v59.02,127.3 63.73,127.3 | 63.73,127.3 68.34,127.3 68.47,127.42 70.5,127.42 71.2,126.72 75.64,126.72 v77.07,125.3 | v63.73,127.84 63.73,127.3
3.3V6  (via drill 0.3)
  Top 0.178: U14.8 v102.24,127.84 102.28,127.88 C42.1 | v85.98,109.55 85.98,108.5 R63.2 | R70.2 97.2,129.58 97.53,129.25 v97.53,127.3 | Q25.3 120.48,127.8 119.51,126.83 117.1,126.83 116.84,126.57 R62.2 116.04,125.77 v115.58,125.3 114.56,125.3 112.59,127.27 112.59,130.32 112.27,130.63 110.88,130.63 110.62,130.89 110.62,132.92 111.09,133.39 C41.1
  Bottom 0.178: v85.98,109.55 85.98,124.55 88.83,127.4 94.38,127.4 94.48,127.3 v97.53,127.3 102.24,127.3 | 102.24,127.3 106.85,127.3 106.98,127.42 109.01,127.42 109.71,126.72 114.15,126.72 v115.58,125.3 | v102.24,127.84 102.24,127.3
3.3V7  (via drill 0.3)
  Top 0.178: U16.8 v140.75,127.84 140.79,127.88 C48.1 | v124.49,109.55 124.49,108.5 R73.2 | R80.2 135.71,129.58 136.04,129.25 v136.04,127.3 | Q29.3 158.99,127.8 158.02,126.83 155.61,126.83 155.35,126.57 R72.2 154.55,125.77 v154.08,125.3 153.07,125.3 151.1,127.27 151.1,130.32 150.78,130.63 149.38,130.63 149.13,130.89 149.13,132.92 149.6,133.39 C47.1
  Bottom 0.178: v124.49,109.55 124.49,124.55 127.34,127.4 132.89,127.4 132.99,127.3 v136.04,127.3 140.75,127.3 | 140.75,127.3 145.36,127.3 145.48,127.42 147.52,127.42 148.22,126.72 152.66,126.72 v154.08,125.3 | v140.75,127.84 140.75,127.3
3.3V_IN  (via drill 0.3)
  Top 0.178: J11.73 17.11,2.68 18.71,4.28 18.71,10.71 18.36,11.05 v18.24,11.05 17.01,11.05 R6.1 | v14.3,11.05 14.26,11.01 12.01,11.01 | 12.01,11.01 R1.2 | Q2.2 11.91,11.11 12.01,11.01
  Bottom 0.178: v14.3,11.05 v18.24,11.05
3.3V_IN1  (via drill 0.3)
  Top 0.178: J1.73 55.62,2.68 57.21,4.28 57.21,10.71 56.87,11.05 v56.75,11.05 55.51,11.05 R13.1 | v52.81,11.05 52.77,11.01 50.52,11.01 | 50.52,11.01 R14.2 | Q1.2 50.42,11.11 50.52,11.01
  Bottom 0.178: v52.81,11.05 v56.75,11.05
3.3V_IN2  (via drill 0.3)
  Top 0.178: J2.73 94.12,2.68 95.72,4.28 95.72,10.71 95.38,11.05 v95.25,11.05 94.02,11.05 R27.1 | v91.32,11.05 91.28,11.01 89.03,11.01 | 89.03,11.01 R28.2 | Q7.2 88.93,11.11 89.03,11.01
  Bottom 0.178: v91.32,11.05 v95.25,11.05
3.3V_IN3  (via drill 0.3)
  Top 0.178: J3.73 132.63,2.68 134.23,4.28 134.23,10.71 133.89,11.05 v133.76,11.05 132.53,11.05 R37.1 | v129.82,11.05 129.78,11.01 127.54,11.01 | 127.54,11.01 R38.2 | Q13.2 127.44,11.11 127.54,11.01
  Bottom 0.178: v129.82,11.05 v133.76,11.05
3.3V_IN4  (via drill 0.3)
  Top 0.178: J4.73 34.61,136.21 33.01,134.61 33.01,128.18 33.35,127.84 v33.48,127.84 34.71,127.84 R47.1 | v37.42,127.84 37.46,127.88 39.7,127.88 | 39.7,127.88 R48.2 | Q17.2 39.8,127.78 39.7,127.88
  Bottom 0.178: v37.42,127.84 v33.48,127.84
3.3V_IN5  (via drill 0.3)
  Top 0.178: J5.73 73.12,136.21 71.52,134.61 71.52,128.18 71.86,127.84 v71.99,127.84 73.22,127.84 R57.1 | v75.92,127.84 75.96,127.88 78.21,127.88 | 78.21,127.88 R58.2 | Q21.2 78.31,127.78 78.21,127.88
  Bottom 0.178: v75.92,127.84 v71.99,127.84
3.3V_IN6  (via drill 0.3)
  Top 0.178: J6.73 111.62,136.21 110.03,134.61 110.03,128.18 110.37,127.84 v110.5,127.84 111.73,127.84 R67.1 | v114.43,127.84 114.47,127.88 116.72,127.88 | 116.72,127.88 R68.2 | Q25.2 116.82,127.78 116.72,127.88
  Bottom 0.178: v114.43,127.84 v110.5,127.84
3.3V_IN7  (via drill 0.3)
  Top 0.178: J7.73 150.13,136.21 148.53,134.61 148.53,128.18 148.88,127.84 v149,127.84 150.24,127.84 R77.1 | v152.94,127.84 152.98,127.88 155.23,127.88 | 155.23,127.88 R78.2 | Q29.2 155.33,127.78 155.23,127.88
  Bottom 0.178: v152.94,127.84 v149,127.84
5V
  Top 0.559: U4.11 39.76,20.33 | 39.76,20.33 40.01,20.33 40.01,20.37 40.96,20.37 C13.1 41.01,22.01 C2.+ | 39.76,16.16 39.76,10.09 MEAS.4 | 39.76,16.16 39.76,18.36 | 39.76,18.36 39.76,20.33 | C1.1 39.95,18.16 39.76,18.36 | C8.A 39.81,16.11 39.76,16.16
  Bottom 0.178: PWR_LED.2 41.08,8.13 MEAS.2 MEAS.4
5V1
  Top 0.559: U2.11 78.27,20.33 | 78.27,20.33 78.52,20.33 78.52,20.37 79.47,20.37 C5.1 79.52,22.01 C7.+ | 78.27,16.16 78.27,10.09 MEAS1.4 | 78.27,16.16 78.27,18.36 | 78.27,18.36 78.27,20.33 | C6.1 78.46,18.16 78.27,18.36 | C9.A 78.32,16.11 78.27,16.16
  Bottom 0.178: PWR_LED1.2 79.59,8.13 MEAS1.2 MEAS1.4
5V2
  Top 0.559: U5.11 116.77,20.33 | 116.77,20.33 117.03,20.33 117.03,20.37 117.97,20.37 C12.1 118.03,22.01 C15.+ | 116.77,16.16 116.77,10.09 MEAS2.4 | 116.77,16.16 116.77,18.36 | 116.77,18.36 116.77,20.33 | C14.1 116.97,18.16 116.77,18.36 | C16.A 116.82,16.11 116.77,16.16
  Bottom 0.178: PWR_LED2.2 118.1,8.13 MEAS2.2 MEAS2.4
5V3
  Top 0.559: U7.11 155.28,20.33 | 155.28,20.33 155.53,20.33 155.53,20.37 156.48,20.37 C19.1 156.53,22.01 C21.+ | 155.28,16.16 155.28,10.09 MEAS3.4 | 155.28,16.16 155.28,18.36 | 155.28,18.36 155.28,20.33 | C20.1 155.48,18.16 155.28,18.36 | C22.A 155.33,16.11 155.28,16.16
  Bottom 0.178: PWR_LED3.2 156.61,8.13 MEAS3.2 MEAS3.4
5V4
  Top 0.559: U9.11 11.96,118.56 | 11.96,118.56 11.71,118.56 11.71,118.52 10.76,118.52 C25.1 10.71,116.88 C27.+ | 11.96,122.73 11.96,128.8 MEAS4.4 | 11.96,122.73 11.96,120.53 | 11.96,120.53 11.96,118.56 | C26.1 11.76,120.73 11.96,120.53 | C28.A 11.91,122.78 11.96,122.73
  Bottom 0.178: PWR_LED4.2 10.63,130.76 MEAS4.2 MEAS4.4
5V5
  Top 0.559: U11.11 50.47,118.56 | 50.47,118.56 50.21,118.56 50.21,118.52 49.27,118.52 C31.1 49.21,116.88 C33.+ | 50.47,122.73 50.47,128.8 MEAS5.4 | 50.47,122.73 50.47,120.53 | 50.47,120.53 50.47,118.56 | C32.1 50.27,120.73 50.47,120.53 | C34.A 50.42,122.78 50.47,122.73
  Bottom 0.178: PWR_LED5.2 49.14,130.76 MEAS5.2 MEAS5.4
5V6
  Top 0.559: U13.11 88.98,118.56 | 88.98,118.56 88.72,118.56 88.72,118.52 87.78,118.52 C37.1 87.72,116.88 C39.+ | 88.98,122.73 88.98,128.8 MEAS6.4 | 88.98,122.73 88.98,120.53 | 88.98,120.53 88.98,118.56 | C38.1 88.78,120.73 88.98,120.53 | C40.A 88.92,122.78 88.98,122.73
  Bottom 0.178: PWR_LED6.2 87.65,130.76 MEAS6.2 MEAS6.4
5V7
  Top 0.559: U15.11 127.48,118.56 | 127.48,118.56 127.23,118.56 127.23,118.52 126.29,118.52 C43.1 126.23,116.88 C45.+ | 127.48,122.73 127.48,128.8 MEAS7.4 | 127.48,122.73 127.48,120.53 | 127.48,120.53 127.48,118.56 | C44.1 127.29,120.73 127.48,120.53 | C46.A 127.43,122.78 127.48,122.73
  Bottom 0.178: PWR_LED7.2 126.16,130.76 MEAS7.2 MEAS7.4
A0  (via drill 0.3)
  Top 0.178: v26.37,5.08 26.49,5.21 U1.1
  Bottom 0.178: J11.36 26.36,5.07 v26.37,5.08
A1  (via drill 0.3)
  Top 0.178: U1.2 27.76,5.64 v27.2,5.08
  Bottom 0.178: v27.2,5.08 26.96,4.84 26.96,4.83 26.86,4.73 J11.34
A2  (via drill 0.3)
  Top 0.178: U1.3 29.03,6.07 v28.04,5.07
  Bottom 0.178: v28.04,5.07 27.36,4.39 J11.32
A3  (via drill 0.3)
  Top 0.178: v64.87,5.08 65,5.21 U3.1
  Bottom 0.178: J1.36 64.87,5.07 v64.87,5.08
A4  (via drill 0.3)
  Top 0.178: U3.3 67.54,6.07 v66.55,5.07
  Bottom 0.178: v66.55,5.07 65.87,4.39 J1.32
A5  (via drill 0.3)
  Top 0.178: U3.2 66.27,5.64 v65.71,5.08
  Bottom 0.178: v65.71,5.08 65.47,4.84 65.47,4.83 65.37,4.73 J1.34
A6  (via drill 0.3)
  Top 0.178: v103.38,5.08 103.51,5.21 U6.1
  Bottom 0.178: J2.36 v103.37,5.07 v103.38,5.08
A7  (via drill 0.3)
  Top 0.178: U6.3 106.05,6.07 v105.06,5.07
  Bottom 0.178: v105.06,5.07 104.37,4.39 J2.32
A8  (via drill 0.3)
  Top 0.178: U6.2 104.78,5.64 v104.22,5.08
  Bottom 0.178: v104.22,5.08 103.98,4.84 103.98,4.83 103.87,4.73 J2.34
A9  (via drill 0.3)
  Top 0.178: v141.89,5.08 142.02,5.21 U8.1
  Bottom 0.178: J3.36 v141.88,5.07 v141.89,5.08
A10  (via drill 0.3)
  Top 0.178: U8.3 144.56,6.07 v143.57,5.07
  Bottom 0.178: v143.57,5.07 142.88,4.39 J3.32
A11  (via drill 0.3)
  Top 0.178: U8.2 143.29,5.64 v142.73,5.08
  Bottom 0.178: v142.73,5.08 142.49,4.84 142.49,4.83 142.38,4.73 J3.34
A12  (via drill 0.3)
  Top 0.178: v25.35,133.81 25.23,133.68 U10.1
  Bottom 0.178: J4.36 25.36,133.82 v25.35,133.81
A13  (via drill 0.3)
  Top 0.178: U10.3 22.68,132.82 v23.68,133.82
  Bottom 0.178: v23.68,133.82 24.36,134.5 J4.32
A14  (via drill 0.3)
  Top 0.178: U10.2 23.96,133.25 v24.51,133.81
  Bottom 0.178: v24.51,133.81 24.75,134.05 24.75,134.06 24.86,134.16 J4.34
A15  (via drill 0.3)
  Top 0.178: v63.86,133.81 63.73,133.68 U12.1
  Bottom 0.178: J5.36 v63.87,133.82 v63.86,133.81
A16  (via drill 0.3)
  Top 0.178: U12.3 61.19,132.82 v62.18,133.82
  Bottom 0.178: v62.18,133.82 62.87,134.5 J5.32
A17  (via drill 0.3)
  Top 0.178: U12.2 62.46,133.25 v63.02,133.81
  Bottom 0.178: v63.02,133.81 63.26,134.05 63.26,134.06 63.37,134.16 J5.34
A18  (via drill 0.3)
  Top 0.178: v102.37,133.81 102.24,133.68 U14.1
  Bottom 0.178: J6.36 v102.38,133.82 v102.37,133.81
A19  (via drill 0.3)
  Top 0.178: U14.3 99.7,132.82 v100.69,133.82
  Bottom 0.178: v100.69,133.82 101.38,134.5 J6.32
A20  (via drill 0.3)
  Top 0.178: U14.2 100.97,133.25 v101.53,133.81
  Bottom 0.178: v101.53,133.81 101.77,134.05 101.77,134.06 101.88,134.16 J6.34
A21  (via drill 0.3)
  Top 0.178: v140.88,133.81 140.75,133.68 U16.1
  Bottom 0.178: J7.36 v140.88,133.82 v140.88,133.81
A22  (via drill 0.3)
  Top 0.178: U16.3 138.21,132.82 v139.2,133.82
  Bottom 0.178: v139.2,133.82 139.88,134.5 J7.32
A23  (via drill 0.3)
  Top 0.178: U16.2 139.48,133.25 v140.04,133.81
  Bottom 0.178: v140.04,133.81 140.28,134.05 140.28,134.06 140.38,134.16 J7.34
EWP  (via drill 0.3)
  Top 0.178: U1.7 27.76,13.97 28.14,14.35 31.7,14.35 32.21,13.84 R4.1 32.75,11.01 33.22,10.54 33.22,8.51 32.84,8.13 v32.21,8.13 | v25.48,7.11 25.48,8.13 v26.49,9.14
  Bottom 0.178: v32.21,8.13 JP1.2 27.1,9.75 v26.49,9.14 | J11.40 25.36,3.23 25.13,3.45 25.13,3.95 25.48,4.29 v25.48,7.11
EWP1  (via drill 0.3)
  Top 0.178: U3.7 66.27,13.97 66.65,14.35 70.21,14.35 70.72,13.84 R20.1 71.26,11.01 71.73,10.54 71.73,8.51 71.35,8.13 v70.72,8.13 | v63.98,7.11 63.98,8.13 v65,9.14
  Bottom 0.178: v70.72,8.13 JP2.2 65.61,9.75 v65,9.14 | J1.40 63.87,3.23 63.64,3.45 63.64,3.95 63.98,4.29 v63.98,7.11
EWP2  (via drill 0.3)
  Top 0.178: U6.7 104.78,13.97 105.16,14.35 108.72,14.35 109.22,13.84 R30.1 109.77,11.01 110.24,10.54 110.24,8.51 109.86,8.13 v109.22,8.13 | v102.49,7.11 102.49,8.13 v103.51,9.14
  Bottom 0.178: v109.22,8.13 JP3.2 104.12,9.75 v103.51,9.14 | J2.40 102.37,3.23 102.15,3.45 102.15,3.95 102.49,4.29 v102.49,7.11
EWP3  (via drill 0.3)
  Top 0.178: U8.7 143.29,13.97 143.67,14.35 147.22,14.35 147.73,13.84 R40.1 148.28,11.01 148.75,10.54 148.75,8.51 148.37,8.13 v147.73,8.13 | v141,7.11 141,8.13 v142.02,9.14
  Bottom 0.178: v147.73,8.13 JP4.2 142.63,9.75 v142.02,9.14 | J3.40 140.88,3.23 140.66,3.45 140.66,3.95 141,4.29 v141,7.11
EWP4  (via drill 0.3)
  Top 0.178: U10.7 23.96,124.92 23.57,124.54 20.02,124.54 19.51,125.05 R50.1 18.96,127.88 18.49,128.35 18.49,130.38 18.88,130.76 v19.51,130.76 | v26.24,131.78 26.24,130.76 v25.23,129.75
  Bottom 0.178: v19.51,130.76 JP5.2 24.62,129.14 v25.23,129.75 | J4.40 26.36,135.66 26.58,135.44 26.58,134.94 26.24,134.6 v26.24,131.78
EWP5  (via drill 0.3)
  Top 0.178: U12.7 62.46,124.92 62.08,124.54 58.52,124.54 58.02,125.05 R60.1 57.47,127.88 57,128.35 57,130.38 57.38,130.76 v58.02,130.76 | v64.75,131.78 64.75,130.76 v63.73,129.75
  Bottom 0.178: v58.02,130.76 JP6.2 63.12,129.14 v63.73,129.75 | J5.40 64.87,135.66 65.09,135.44 65.09,134.94 64.75,134.6 v64.75,131.78
EWP6  (via drill 0.3)
  Top 0.178: U14.7 100.97,124.92 100.59,124.54 97.03,124.54 96.53,125.05 R70.1 95.98,127.88 95.51,128.35 95.51,130.38 95.89,130.76 v96.53,130.76 | v103.26,131.78 103.26,130.76 v102.24,129.75
  Bottom 0.178: v96.53,130.76 JP7.2 101.63,129.14 v102.24,129.75 | J6.40 103.38,135.66 103.6,135.44 103.6,134.94 103.26,134.6 v103.26,131.78
EWP7  (via drill 0.3)
  Top 0.178: U16.7 139.48,124.92 139.1,124.54 135.54,124.54 135.03,125.05 R80.1 134.49,127.88 134.02,128.35 134.02,130.38 134.4,130.76 v135.03,130.76 | v141.77,131.78 141.77,130.76 v140.75,129.75
  Bottom 0.178: v135.03,130.76 JP8.2 140.14,129.14 v140.75,129.75 | J7.40 141.88,135.66 142.11,135.44 142.11,134.94 141.77,134.6 v141.77,131.78
GND  (via drill 0.3)  (77 unrouted)
  Top 0.254: J11.GND4 42.56,43.2 J11.GND5 | J11.GND1 9.16,43.2 J11.GND2
  other vias: 13.67,16.27 15.95,18.05 11.76,17.92 11.63,38.24 13.67,39.89 15.82,38.24 18.75,51.83 17.22,53.99 18.87,56.15 21.41,56.28 23.06,54.12 21.41,51.83 28.65,57.15 28.65,53.99 30.3,51.96 34.87,53.86 40.08,38.24 38.05,39.89 35.89,38.24 35.64,17.92 37.67,16.4 43.98,12.97 43.91,18.47 43.82,26 43,10.41 28.65,59.05 28.65,60.33 28.65,61.59 28.65,62.87 28.65,64.14 37.03,64.14 37.03,62.87 37.03,61.59 37.03,60.33 37.03,59.05 35.38,4.59 30.05,5.73 25.73,3.7 24.21,3.7 14.3,4.97 34.24,55.9 34.24,57.17 31.57,57.17 31.57,56.02 37.03,57.17 32.84,51.96 13.16,12.59
  pour Bottom (isolate 0.152): 6.86,0 6.86,65 44.86,65 44.86,0
  pour Top (isolate 0.152): 6.86,0 6.86,65 44.86,65 44.86,0
GND1  (via drill 0.3)  (77 unrouted)
  Top 0.254: J1.GND4 81.07,43.2 J1.GND5 | J1.GND1 47.67,43.2 J1.GND2
  other vias: 52.17,16.27 54.46,18.05 50.27,17.92 50.14,38.24 52.17,39.89 54.33,38.24 57.25,51.83 55.73,53.99 57.38,56.15 59.92,56.28 61.57,54.12 59.92,51.83 67.16,57.15 67.16,53.99 68.81,51.96 73.38,53.86 78.59,38.24 76.56,39.89 74.4,38.24 74.15,17.92 76.18,16.4 82.49,12.97 82.42,18.47 82.33,26 81.51,10.41 67.16,59.05 67.16,60.33 67.16,61.59 67.16,62.87 67.16,64.14 75.54,64.14 75.54,62.87 75.54,61.59 75.54,60.33 75.54,59.05 73.89,4.59 68.56,5.73 64.24,3.7 62.72,3.7 52.81,4.97 72.75,55.9 72.75,57.17 70.08,57.17 70.08,56.02 75.54,57.17 71.35,51.96 51.67,12.59
  pour Bottom (isolate 0.152): 45.37,0 45.37,65 83.37,65 83.37,0
  pour Top (isolate 0.152): 45.37,0 45.37,65 83.37,65 83.37,0
GND2  (via drill 0.3)  (77 unrouted)
  Top 0.254: J2.GND4 119.57,43.2 J2.GND5 | J2.GND1 86.17,43.2 J2.GND2